# Altium PCB RX Layout.PcbDoc (part 1 of 2)
Units mm, origin at the board's own origin, x right, y up, seen from the top; angles counter-clockwise.
Board outline 88 x 80 mm, 4 copper layers (Top Layer, Mid 1, Mid 2, Bottom Layer), stack 0.603 mm thick; 110 components, 43 nets, 265 pads, 273 vias.
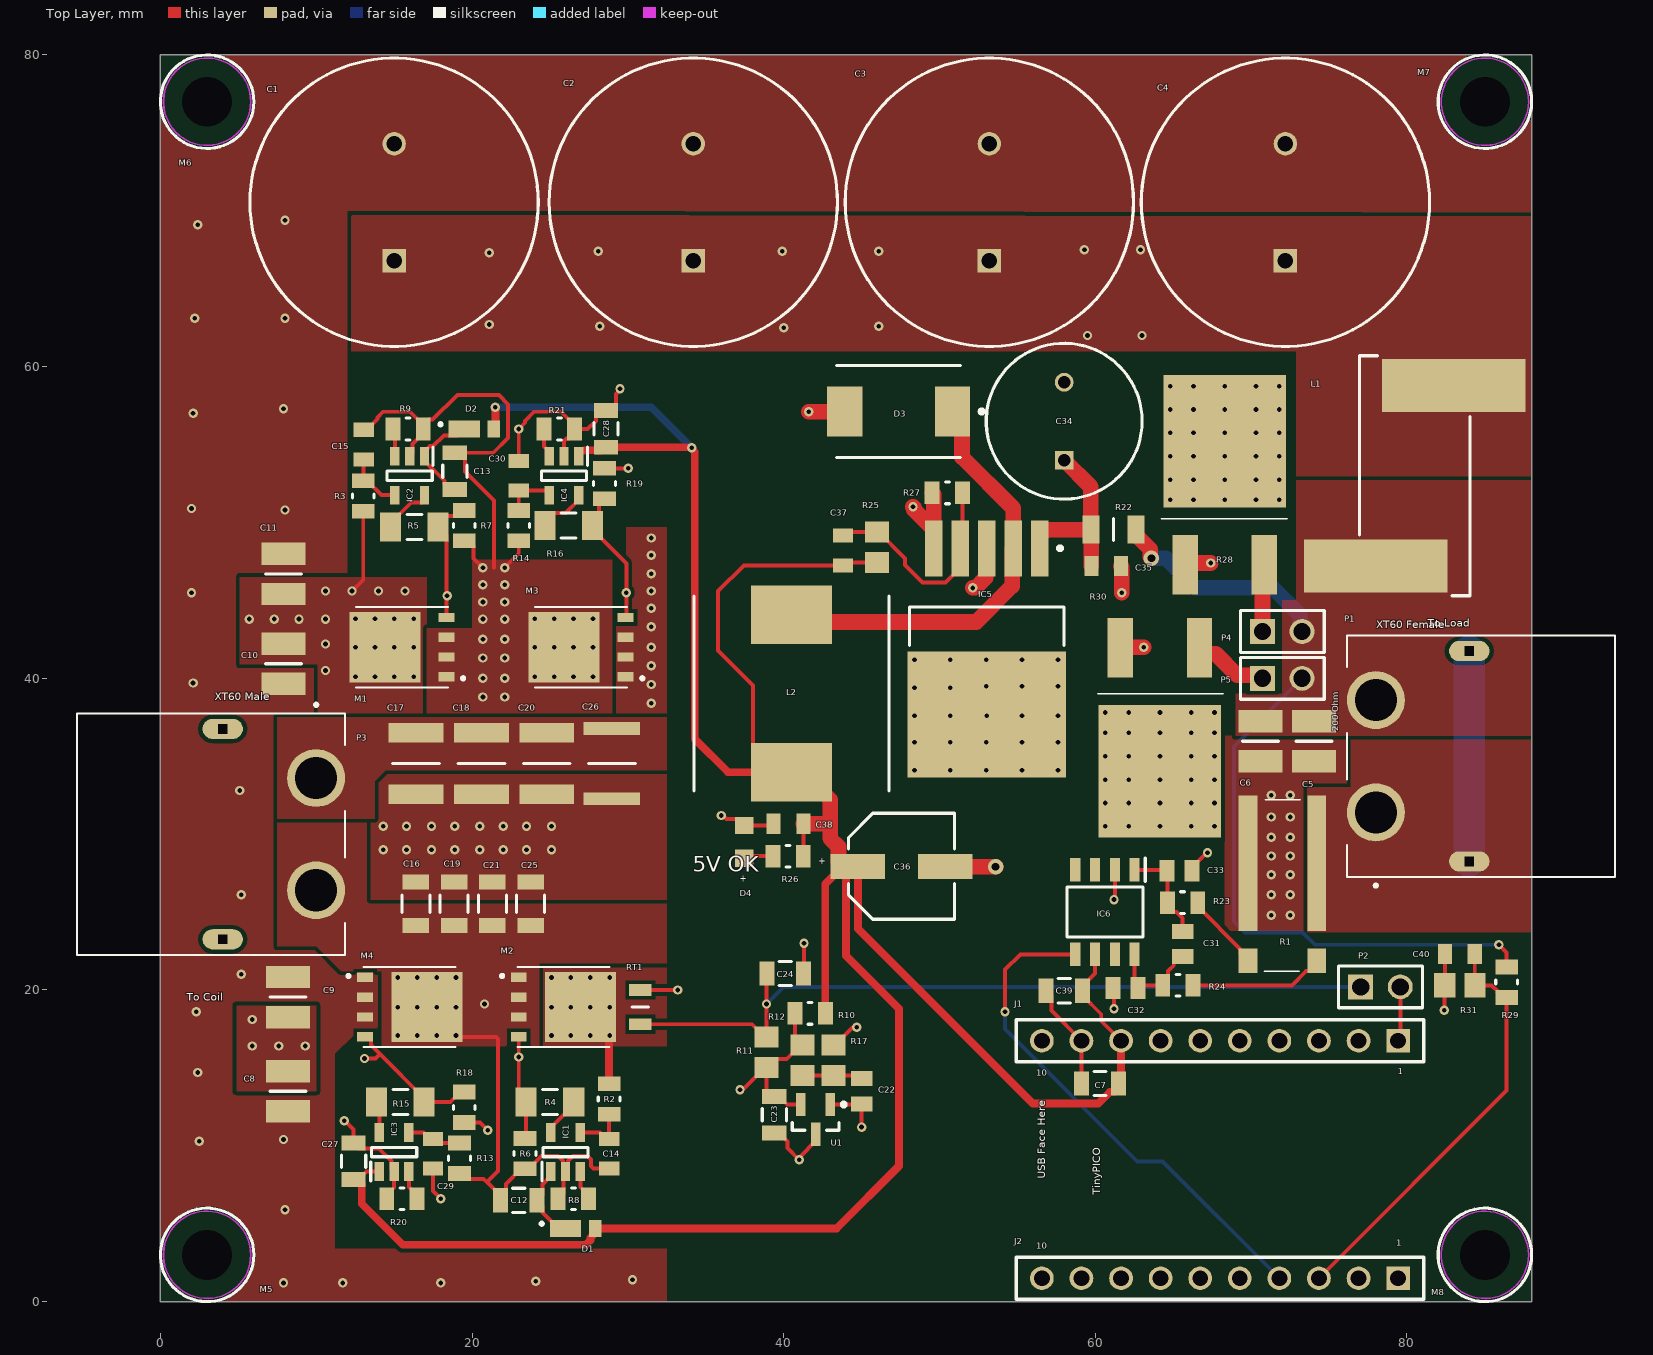
[diagram p0: Top Layer view]
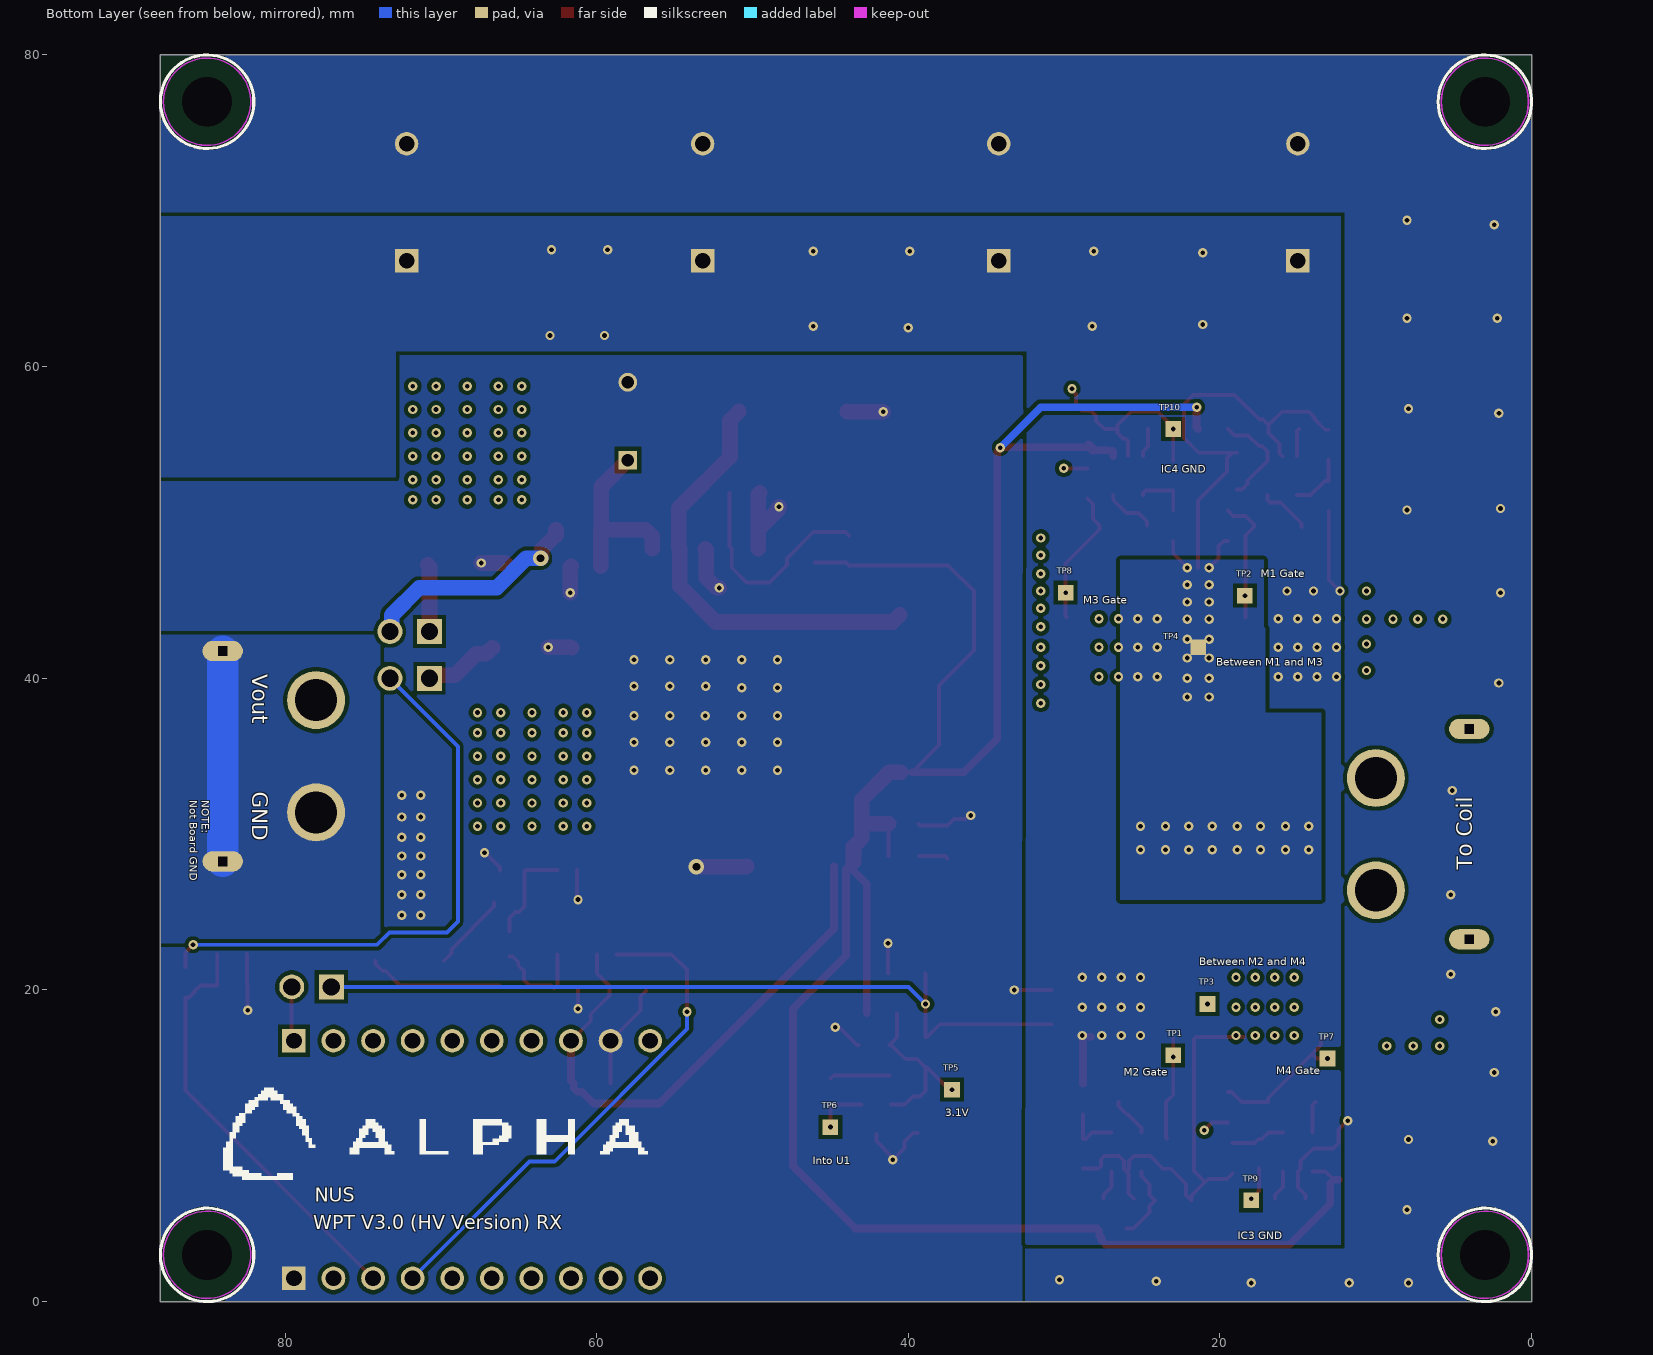
[diagram p1: Bottom Layer view, seen from below]
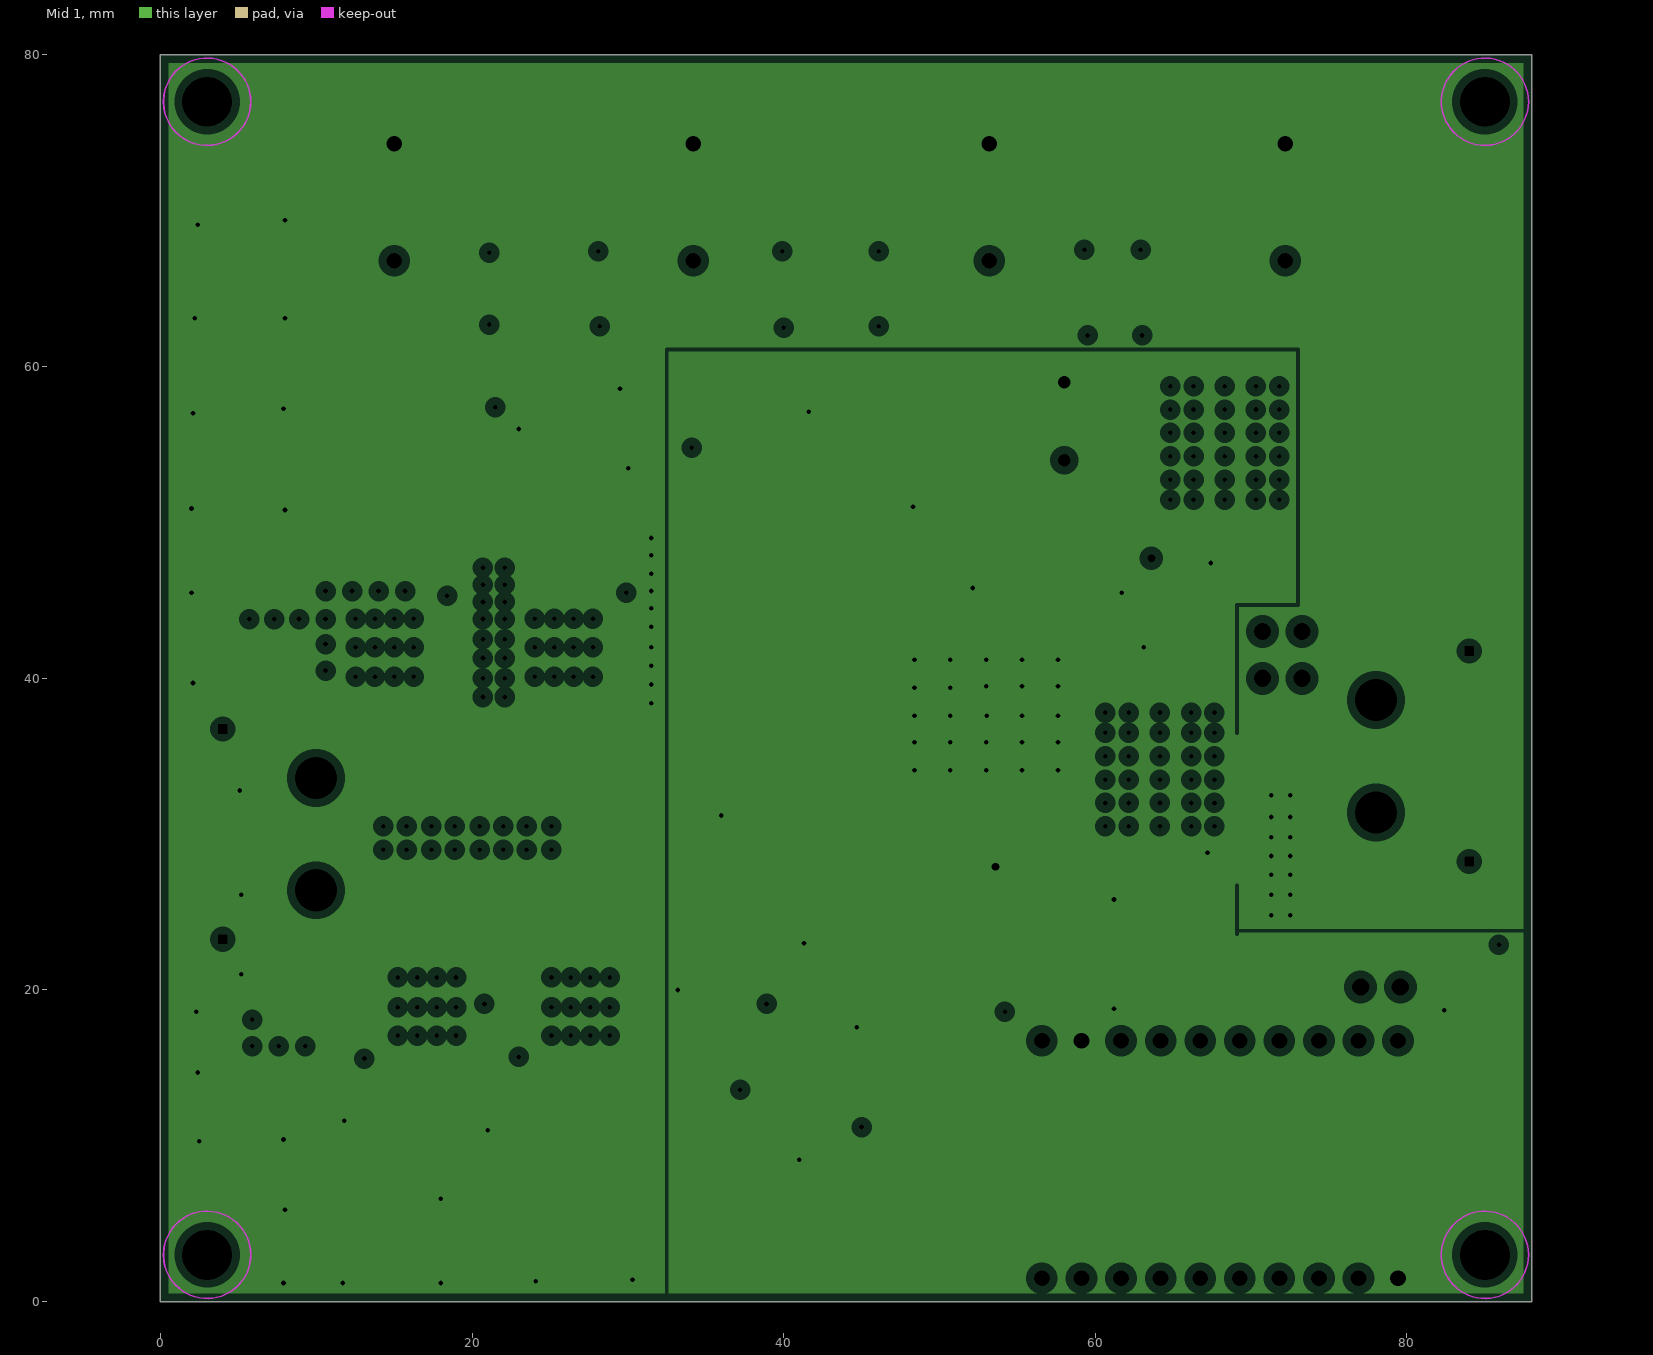
[diagram p2: Mid 1, clearances drawn from the general rule]
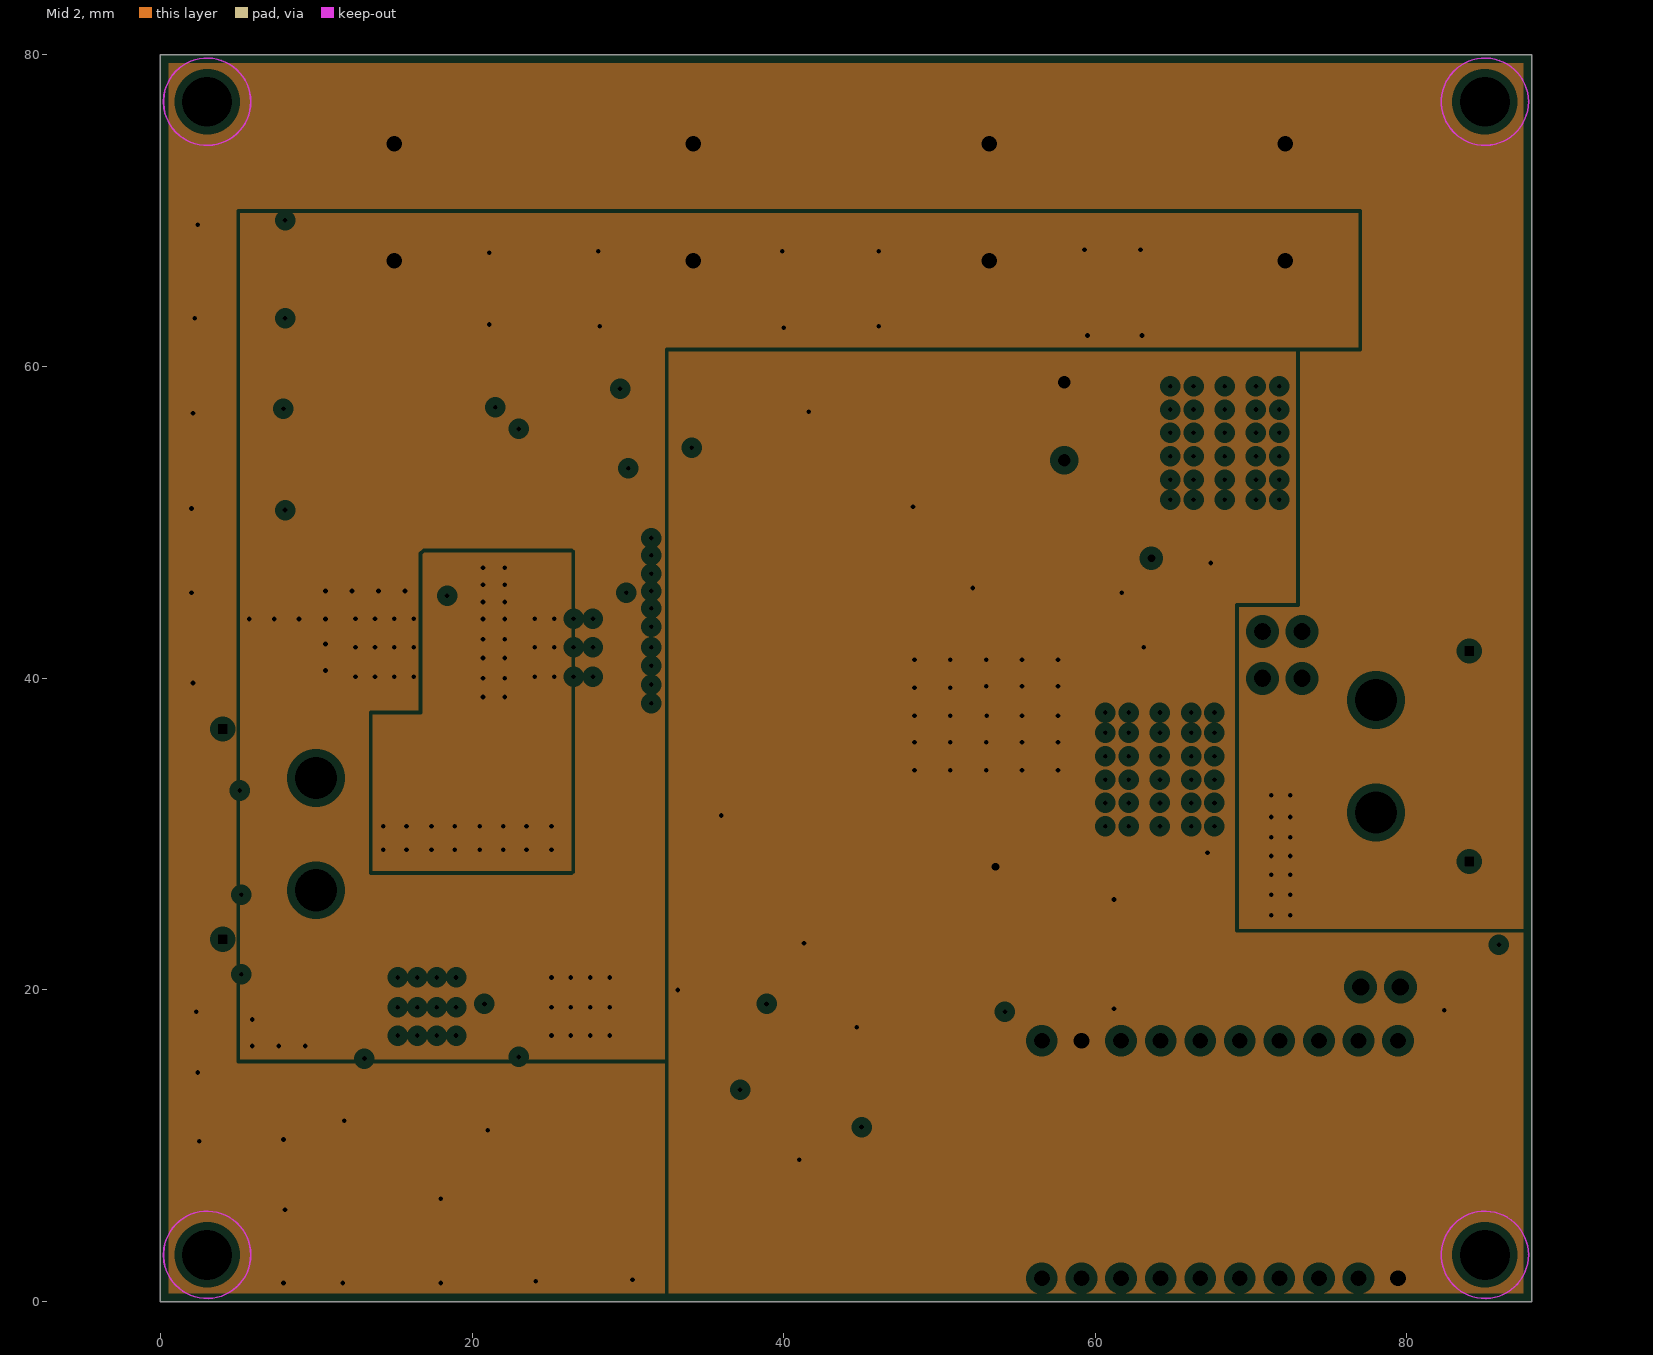
[diagram p3: Mid 2, clearances drawn from the general rule]
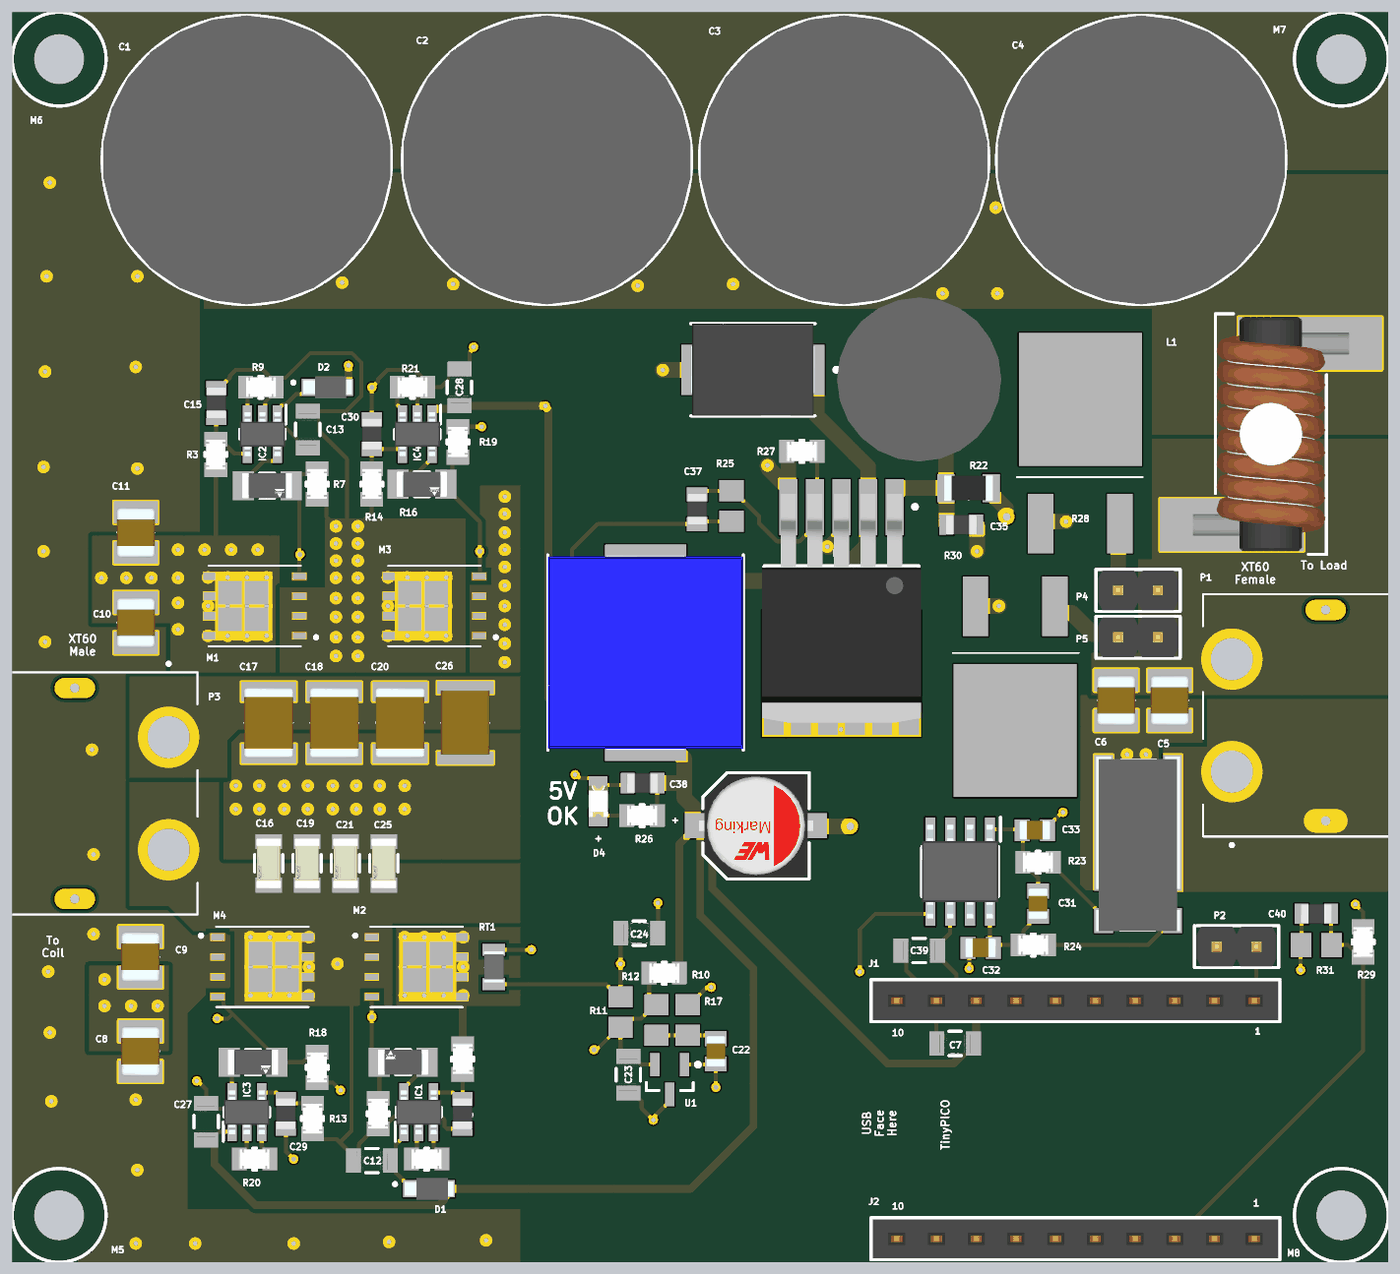
[diagram p4: 3D render of the assembled board from above, using the file's embedded part models]

## Layer stack, top to bottom
Top Solder: solder mask 0.0102, Solder Resist, Dk 3.5
Top Layer: signal copper 0.0356
Dielectric 2: prepreg 0.0711, PP-006, Dk 4.1
Mid 1: plane copper 0.035, net GND
Dielectric 1: dielectric 0.32, FR-4, Dk 4.8
Mid 2: plane copper 0.035, net (Multiple Nets)
Dielectric 3: prepreg 0.0711, PP-006, Dk 4.1
Bottom Layer: signal copper 0.0356
Bottom Solder: solder mask 0.0102, Solder Resist, Dk 3.5

## Board outline
0,80 88,80 88,0 0,0

## Design rules (kind name [scope] priority, off if disabled: settings)
Clearance [All] p1: gap=0.254 ignorepadtopadclearanceinfootprint=TRUE except(0: Arc-Hole Track-Hole SMDPad-Hole THPad-Hole Via-Hole Fill-Hole Poly-Hole Region-Hole Text-Hole)
Height [All] p1: minheight=0 maxheight=100 prefheight=12.7
HoleSize [All] p1: absolutevalues=TRUE maxlimit=10 minlimit=0.025 maxpercent=80.000 minpercent=20.000
MinimumSolderMaskSliver [All] p1: minsoldermaskwidth=0.1
PlaneClearance [All] p1: clearance=0.508
PlaneConnect [All] p1: planeconnectstyle=Direct reliefexpansion=0.508 reliefentries=4 reliefconductorwidth=0.254 reliefairgap=0.254
PolygonConnect [All] p1: connectstyle=Direct reliefconductorwidth=0.254 reliefentries=4 polygonreliefangle="90 Angle" airgapwidth=0.254
RoutingVias [All] p1: holewidth=0.711 width=1.27 viastyle="Through Hole" minholewidth=0.3 minwidth=0.6 maxholewidth=0.711 maxwidth=1.27
SilkToSilkClearance [All] p1: silktosilkclearance=0.1
SilkToSolderMaskClearance [IsPad] p1: minsilkscreentomaskgap=0.1 clearancetoexposedcopper=TRUE
SolderMaskExpansion [All] p1: expansion=0.102 istentingtop=FALSE
Width [All] p1: maxlimit=10 minlimit=0.254 preferedwidth=0.254
23 further rules are at their usual default settings.

## Components (designator, comment, footprint, x,y, rotation, side; value= is the part's Value field where it differs from the comment)
C1 "1000uF / 100VDC" CAPPRD750W80D1850H4200 15,66.8 r90 top
C2 "1000uF / 100VDC" CAPPRD750W80D1850H4200 34.2,66.8 r90 top
C3 "1000uF / 100VDC" CAPPRD750W80D1850H4200 53.2,66.8 r90 top
C4 "1000uF / 100VDC" CAPPRD750W80D1850H4200 72.2,66.8 r90 top
C5 "4.7uF / 100VDC" CAPC3225X280N 74.024,35.959 r90 top
C6 "4.7uF / 100VDC" CAPC3225X280N 70.6,35.959 r90 top
C7 "10nF/50V" "0805 CAPACITOR" 60.3,14 r0 top
C8 "4.7uF/100VDC" CAPC3225X280N 8.2,13.5 r90 top
C9 "4.7uF/100VDC" CAPC3225X280N 8.2,19.541 r270 top
C10 "4.7uF/100VDC" CAPC3225X280N 7.9,40.934 r90 top
C11 "4.7uF/100VDC" CAPC3225X280N 7.9,46.7 r270 top
C12 "100nF/50V" "0805 CAPACITOR" 23,6.5 r0 top
C13 "100nF/50V" "0805 CAPACITOR" 18.9,53.3 r270 top
C14 "100pF, 100V" WCAP-CSGP_0805_H=0.6mm_Reflow 28.8,9.5 r90 top
C15 "100pF, 100V" WCAP-CSGP_0805_H=0.6mm_Reflow 13.046,55 r270 top
C16 "470pF/200V" FP-C1206C-EB-MFG 16.4,25.532 r90 top value="470 pF"
C17 "100nF/250V" CAPC4532X220N 16.4,34.532 r270 top
C18 "100nF/250V" CAPC4532X220N 20.6,34.532 r270 top
C19 "470pF/200V" FP-C1206C-EB-MFG 18.854,25.532 r90 top value="470 pF"
C20 "100nF/250V" CAPC4532X220N 24.8,34.532 r270 top
C21 "470pF/200V" FP-C1206C-EB-MFG 21.309,25.532 r90 top value="470 pF"
C22 "1nF/50V" CAPC2012X90N 45,13.5 r90 top
C23 "10nF/50V" "0805 CAPACITOR" 39.4,12 r90 top
C24 "100nF/50V" "0805 CAPACITOR" 40.1,21.057 r180 top
C25 "470pF/200V" FP-C1206C-EB-MFG 23.763,25.532 r90 top value="470 pF"
C26 "47nF/250V" CAPC4532X350N 28.974,34.532 r270 top
C27 "100nF/50V" "0805 CAPACITOR" 12.4,9 r270 top
C28 "100nF/50V" "0805 CAPACITOR" 28.6,56 r270 top
C29 "100pF, 100V" WCAP-CSGP_0805_H=0.6mm_Reflow 17.5,9.5 r90 top
C30 "100pF, 100V" WCAP-CSGP_0805_H=0.6mm_Reflow 23,53 r270 top
C31 "1nF/50V" CAPC2012X90N 65.6,22.944 r270 top
C32 "1nF/50V" CAPC2012X90N 61.931,20.121 r180 top
C33 "1nF/50V" CAPC2012X90N 65.4,27.654 r180 top
C34 "100uF / 100VDC" CAPPRD500W60D1000H2200 58,54 r90 top
C35 "100nF, 100V" WCAP-CSGP_0805_H=1.25MM 60.7,47.2 r180 top
C36 "100uF, 16V" WCAP-ASLI_D6.3H5.5 47.566,27.936 r180 top
C37 "33nF, 25V" WCAP-CSGP_0805_H=0.8mm_Reflow 43.8,48.2 r270 top
C38 "1uF, 25V" WCAP-CSGP_0805_H=1.25MM 40.309,30.661 r0 top
C39 "100nF/50V" "0805 CAPACITOR" 58,19.947 r180 top
C40 "10nF, 100V" WCAP-CSGP_0805_H=0.8mm_Reflow 83.399,22.3 r0 top
D1 "Schottky Diode" RB400VAM50TR 26,4.7 r270 top
D2 "Schottky Diode" RB400VAM50TR 19.5,56 r270 top
D3 "Schottky Diode" DIONM8059X265N 47.371,57.121 r180 top
D4 "Green, 3.2V" WL-SMCW_0805 37.48,29.5 r270 top
IC1 "Gate Driver IC" SOT95P280X145-5N 26,9.6 r90 top
IC2 "Gate Driver IC" SOT95P280X145-5N 16,53 r270 top
IC3 "Gate Driver IC" SOT95P280X145-5N 15,9.6 r90 top
IC4 "Gate Driver IC" SOT95P280X145-5N 25.9,53 r270 top
IC5 "DCDC Adj" TO-263-5 53.032,41.871 r270 top
IC6 "Amplifier" SOIC127P600X175-8N 60.621,25 r270 top
J1 "61301011821" 61301011821 68,16.74 r180 top
J2 "61301011821" 61301011821 68,1.5 r180 top
L1 "1uH, 22.5A" 7847227010 80.5,53 r270 top
L2 "100uH/2.1A/150mOhm" INDPM125125X800N 40.503,39.016 r270 top
M1 "ISC0805NLS" PG-TDSON-8 15.5,42 r180 top
M2 "ISC0805NLS" PG-TDSON-8 25.863,18.9 r0 top
M3 "ISC0805NLS" PG-TDSON-8 27,42 r180 top
M4 "ISC0805NLS" PG-TDSON-8 16,18.9 r0 top
M5 "M3 Mounting Hole" "M3 HOLE" 3,3 r0 top
M6 "M3 Mounting Hole" "M3 HOLE" 3,77 r0 top
M7 "M3 Mounting Hole" "M3 HOLE" 85,77 r0 top
M8 "M3 Mounting Hole" "M3 HOLE" 85,3 r0 top
P1 "XT60-F" AMASS_XT60PW-F 78,35 r90 top
P2 "61300211121" 61300211121 78.3,20.2 r0 top
P3 "XT60-F" AMASS_XT60PW-F 10,30 r270 top
P4 "61300211121" 61300211121 72,43 r0 top
P5 "61300211121" 61300211121 72,40 r0 top
R1 "0R005 5W" FC4L110R005FER 72,25 r180 top
R2 "1KR" FP-CRCW0805-E3-MFG 28.8,13 r90 top
R3 "1KR" FP-CRCW0805-E3-MFG 13.021,51.7 r270 top
R4 "10R" FP-CRCW1206-E3-IPC_A 25,12.8 r180 top
R5 "10R" FP-CRCW1206-E3-IPC_A 16.3,49.7 r0 top
R6 "10KR" FP-CRCW0805-E3-MFG 23.4,9.5 r90 top
R7 "10KR" FP-CRCW0805-E3-MFG 19.5,49.8 r90 top
R8 "10KR" FP-CRCW0805-E3-MFG 26.5,6.6 r0 top
R9 "10KR" FP-CRCW0805-E3-MFG 15.9,56 r180 top
R10 "1KR" FP-CRCW0805-E3-MFG 41.7,18.5 r0 top
R11 "10k" "0805 RESISTOR" 38.9,16 r270 top
R12 "15K" "0805 RESISTOR" 41.2,15.5 r90 top
R13 "1KR" FP-CRCW0805-E3-MFG 19.2,9.2 r270 top
R14 "1KR" FP-CRCW0805-E3-MFG 23,49.8 r270 top
R15 "10R" FP-CRCW1206-E3-IPC_A 15.4,12.8 r0 top
R16 "10R" FP-CRCW1206-E3-IPC_A 26.2,49.8 r0 top
R17 "10K" "0805 RESISTOR" 43.2,15.5 r270 top
R18 "10KR" FP-CRCW0805-E3-MFG 19.5,12.47 r90 top
R19 "10KR" FP-CRCW0805-E3-MFG 28.5,52.5 r270 top
R20 "10KR" FP-CRCW0805-E3-MFG 15.5,6.6 r0 top
R21 "10KR" FP-CRCW0805-E3-MFG 25.6,56 r180 top
R22 "3R" 1206_RESISTOR 61.161,49.546 r0 top
R23 "470R" FP-CRCW0805-E3-MFG 65.6,25.6 r0 top
R24 "470R" FP-CRCW0805-E3-MFG 65.3,20.3 r0 top
R25 "15K" "0805 RESISTOR" 46,48.4 r270 top
R26 "2KO" FP-CRCW0805-E3-MFG 40.284,28.582 r0 top
R27 "5K Ohm" FP-CRCW0805-E3-MFG 50.5,51.9 r0 top
R28 "200 Ohm / 25W" PWR163S253000FE 68.306,51.249 r0 top
R29 "1M ohm" FP-CRCW0805-E3-MFG 86.399,20.5 r90 top
R30 "200 Ohm / 25W" PWR163S253000FE 64.146,38 r180 top
R31 "56K" "0805 RESISTOR" 83.399,20.3 r0 top
RT1 "Thermistor 10K" THRMC2012X95N 30.8,18.9 r90 top
TP1 "TP" "TEST POINT" 23,15.8 r180 bottom
TP2 "TP" "TEST POINT" 18.4,45.3 r180 bottom
TP3 "TP" "TEST POINT" 20.8,19.1 r180 bottom
TP4 "TP" "TEST POINT" 21.4,42 r180 bottom
TP5 "TP" "TEST POINT" 37.2,13.6 r180 bottom
TP6 "TP" "TEST POINT" 45,11.2 r180 bottom
TP7 "TP" "TEST POINT" 13.1,15.6 r180 bottom
TP8 "TP" "TEST POINT" 29.9,45.5 r180 bottom
TP9 "TP" "TEST POINT" 18,6.5 r180 bottom
TP10 "TP" "TEST POINT" 23,56 r90 bottom
U1 "Shunt Voltage Reference Diode" SOT23-3_N 42.05,11.696 r270 top

## Footprints (in the part's own frame and the unit in brackets; to place one, negate y for a bottom-side part, rotate by r counter-clockwise, add the part's x,y. Pads: shape width x height; smd on the part's side, far side on the other; paste and mask are expansions set on the pad)
"0805 CAPACITOR" [mm]
  rect 0.956x1.556 smd paste+0 mask+0: 1(-1.175,0) 2(1.175,0)
  silkscreen extent -0.4,-0.78 0.4,0.78, body extent -2.15,-1.28 2.15,1.28, height 0.25
"0805 RESISTOR" [mm] "Chip Resistor, 2-Leads, Body 2.00x1.25mm, IPC Low Density"
  rect 1.35x1.55 smd: 1(-0.975,0) 2(0.975,0)
  body extent -1.1,-0.72 1.1,0.72, height 0.7
1206_RESISTOR [mm]
  rect 1.1x1.8 smd: 1(-1.45,0) 2(1.45,0)
  silkscreen extent 0,-0.7 0,0.7, body extent -1.55,-0.8 1.55,0.8, height 0.65
7847227010 [mm] "Rod Core Inductor SMT, body 15x7.1mm"
  rect 3.4x9.2 smd: 1(-5.8,2.5) 2(5.8,-2.5)
  silkscreen extent -7.7,-3.55 7.7,3.55, body extent -7.5,-5 7.5,5, height 7.85
61300211121 [mm] "Pin Header, pitch 2.54 mm, THT, Vertical, single row, 2p"
  rect 1.6x1.6 hole 1.1: 1(-1.27,0)
  round 1.6 hole 1.1: 2(1.27,0)
  silkscreen extent -2.69,-1.35 2.69,1.35, body extent -2.54,-1.27 2.54,1.27, height 8.57
61301011821 [mm] "Socket Header, Pitch 2.54 mm, THT, Vertical, single row, 10p"
  rect 1.52x1.52 hole 1.02: 1(-11.43,0)
  round 1.52 hole 1.02: 2(-8.89,0) 3(-6.35,0) 4(-3.81,0) 5(-1.27,0) 6(1.27,0) 7(3.81,0) 8(6.35,0) 9(8.89,0) 10(11.43,0)
  silkscreen extent -13.08,-1.35 13.08,1.35, body extent -12.95,-1.25 12.95,1.25, height 8.55
AMASS_XT60PW-F [mm]
  round 3.716 hole 2.7: 1(-3.6,0) 2(3.6,0)
  oval 1.3x2.6 hole 0.6 square: S1(-6.75,-6) S2(6.75,-6)
  silkscreen extent -8.4,-15.35 7.75,1.85
CAPC2012X90N [mm]
  rect 0.96x1.39 smd: 1(-0.81,0) 2(0.81,0)
  body extent -1,-0.63 1,0.63, height 0.9
CAPC3225X280N [mm]
  rect 1.43x2.82 smd: 1(-1.29,0) 2(1.29,0)
  silkscreen extent 0,-1.15 0,1.15, body extent -1.6,-1.25 1.6,1.25, height 2.8
CAPC4532X220N [mm]
  rect 1.25x3.52 smd: 1(-1.98,0) 2(1.98,0)
  silkscreen extent 0,-1.5 0,1.5, body extent -2.25,-1.6 2.25,1.6, height 2.2
CAPC4532X350N [mm]
  rect 0.81x3.61 smd: 1(-2.25,0) 2(2.25,0)
  silkscreen extent 0,-1.5 0,1.5, body extent -2.05,-1.57 2.05,1.57, height 3.46
CAPPRD500W60D1000H2200 [mm]
  rect 1.2x1.2 hole 0.8: 1(0,0)
  round 1.2 hole 0.8: 2(5,0)
  silkscreen extent -2.5,-5 7.5,5, body extent -2.75,-5.25 7.75,5.25, height 22
CAPPRD750W80D1850H4200 [mm]
  rect 1.5x1.5 hole 1: 1(0,0)
  round 1.5 hole 1: 2(7.5,0)
  silkscreen extent -5.5,-9.25 13,9.25, body extent -5.5,-9.25 13,9.25, height 42
DIONM8059X265N [mm]
  rect 2.25x3.2 smd: 1(-3.45,0) 2(3.45,0)
  silkscreen extent -5.46,-2.95 3.98,2.95, body extent -3.98,-2.95 3.98,2.95, height 2.65
FC4L110R005FER [mm]
  rect 1.2x8.7 smd: 1(-2.2,-3.125) 2(2.2,-3.125)
  rect 1.2x1.6 smd: 3(2.2,3.125) 4(-2.2,3.125)
  silkscreen extent -1.15,-7.2 1.15,3.8, body extent -2.68,-7.35 2.68,3.8, height 0.8
FP-C1206C-EB-MFG [mm]
  rect 0.95x1.7 smd paste+0 mask+0: 1(-1.4,0) 2(1.4,0)
  silkscreen extent -0.55,-0.9 0.55,0.9, body extent -2,-1 2,1, height 0.25
FP-CRCW0805-E3-MFG [mm]
  rect 0.95x1.45 smd paste+0 mask+0: 1(-0.975,0) 2(0.975,0)
  silkscreen extent -0.13,-0.7 0.13,0.7, body extent -1.55,-0.82 1.55,0.82, height 0.25
FP-CRCW1206-E3-IPC_A [mm]
  rect 1.356x1.858 smd paste+0 mask+0: 1(-1.526,0) 2(1.526,0)
  silkscreen extent -0.47,-0.8 0.47,0.8, body extent -2.7,-1.43 2.7,1.43, height 0.25
INDPM125125X800N [mm]
  rect 3.75x5.2 smd: 1(-5.05,0) 2(5.05,0)
  silkscreen extent -6.25,-6.25 6.25,6.25, body extent -6.25,-6.25 6.25,6.25, height 8
"M3 HOLE" [mm]
  round 0 hole 3.2 unplated mask+0.1: 1(0,0)
  Keep-Out Layer circle w0.1: c0,0 r2.8
  silkscreen extent -3,-3 3,3
PG-TDSON-8 [mm]
  rect 1.025x0.6 smd paste-2 mask+0: 1(-2.863,1.905) 2(-2.863,0.635) 3(-2.863,-0.635) 4(-2.863,-1.905)
  rect 4.555x4.51 smd paste-3 mask+0: 5_8(1.098,0)
  silkscreen extent -4.03,-2.58 2.95,2.58
PWR163S253000FE [mm]
  rect 1.62x3.81 smd: 1(-2.54,-3.97) 2(2.54,-3.97)
  rect 7.87x8.51 smd: 3(0,3.97)
  silkscreen extent -4.07,-1 4,-1
RB400VAM50TR [mm]
  rect 1.1x2 smd: 1(0,0)
  rect 1.1x0.8 smd: 2(0,1.9)
  silkscreen extent -0.4,-1.62 -0.2,-1.43, body extent -0.7,-0.89 0.7,2.22, height 0.9
SOIC127P600X175-8N [mm]
  rect 1.525x0.65 smd: 1(-2.712,1.905) 2(-2.712,0.635) 3(-2.712,-0.635) 4(-2.712,-1.905) 5(2.712,-1.905) 6(2.712,-0.635) 7(2.712,0.635) 8(2.712,1.905)
  silkscreen extent -3.47,-2.45 1.6,2.58, body extent -3,-2.45 3,2.45, height 1.75
SOT23-3_N [mm] "SOT23, 3-Leads, Body 2.9x1.3mm, Pitch 0.95mm, Lead Span 2.4mm, IPC Medium Density"
  rect 1.5x0.6 smd: 1(-0.95,0.95) 2(-0.95,-0.95) 3(0.95,0)
  silkscreen extent -1.07,-1.5 0.7,1.93, body extent -0.7,-1.52 0.7,1.52, height 1.12
SOT95P280X145-5N [mm]
  rect 1.2x0.6 smd: 1(-1.25,0.95) 2(-1.25,0) 3(-1.25,-0.95) 4(1.25,-0.95) 5(1.25,0.95)
  silkscreen extent -1.85,-1.45 0.3,1.5, body extent -1.4,-1.45 1.4,1.45, height 1.45
"TEST POINT" [mm]
  rect 1x1 smd: 1(0,0)
THRMC2012X95N [mm]
  rect 0.75x1.45 smd: 1(-1.1,0) 2(1.1,0)
  silkscreen extent 0,-0.53 0,0.53, body extent -1,-0.63 1,0.63, height 0.95
TO-263-5 [mm] "D2-PAK, 6-Pads, Body 8,9x9,9mm (max), IPC Low Density"
  rect 3.6x1.15 smd: 1(-6.45,3.4) 2(-6.45,1.7) 3(-6.45,0) 4(-6.45,-1.7) 5(-6.45,-3.4)
  rect 8.1x10.15 smd paste-5: 6(4.2,0)
  silkscreen extent -6.6,-4.95 -0.25,4.95, body extent -7.31,-5.08 7.33,5.08, height 4.57
WCAP-ASLI_D6.3H5.5 [mm] "Aluminium Electrolytic V-Chip SMT Capacitors, 6.3x5.5mm"
  rect 3.5x1.6 smd: 1(2.8,0) 2(-2.8,0)
  silkscreen extent -3.4,-3.4 3.4,3.4, body extent -3.65,-3.3 3.65,3.3, height 5.5
WCAP-CSGP_0805_H=0.6mm_Reflow [mm] "Ceramic Capacitors, body 2x1.25mm"
  rect 0.9x1.3 smd: 1(-0.95,0) 2(0.95,0)
  body extent -1,-0.62 1,0.63, height 0.6
WCAP-CSGP_0805_H=0.8mm_Reflow [mm] "Ceramic Capacitors, body 2x1.25mm"
  rect 0.9x1.3 smd: 1(-0.95,0) 2(0.95,0)
  body extent -1,-0.62 1,0.63, height 0.8
WCAP-CSGP_0805_H=1.25MM [mm] "Ceramic Capacitors, body 2x1.25mm"
  rect 0.9x1.3 smd: 1(-0.95,0) 2(0.95,0)
  body extent -1,-0.62 1,0.63, height 1.25
WL-SMCW_0805 [mm] "SMD Mono-color Chip LED, body 2.0x1.25mm"
  rect 1.1x1.2 smd: 1(-1.05,0) 2(1.05,0)
  body extent -1,-0.63 1,0.62, height 0.7

## Part data
C1 C2 C3 C4: library part UPW2A102MHD, "Capacitor Polarised", Manufacturer_Name=Nichicon, Mouser Part Number=647-UPW2A102MHD, Arrow Part Number=UPW2A102MHD, Arrow Price/Stock=https://www.arrow.com/en/products/upw2a102mhd/nichicon, Datasheet Link=http://www.nichicon.co.jp/english/products/pdfs/e-pw.pdf, Height=42mm, Manufacturer_Part_Number=UPW2A102MHD, Mouser Price/Stock=https://www.mouser.co.uk/ProductDetail/Nichicon/UPW2A102MHD/?qs=vtm6YctIBsEhKvWuRIWL3Q%3D%3D
C5 C6: library part CL32B475KCVZNWE, "Capacitor", Manufacturer_Name="Samsung Electro-Mechanics", Height=2.8mm, Manufacturer_Part_Number=CL32B475KCVZNWE
C7 C23: library part 885012207092, Supplier Part Number 1=710-885012207092, Supplier 1=Mouser
C8 C9 C10 C11: library part CNC6P1X7R2A475K250AE, Manufacturer_Name=TDK, Mouser2 Part Number=810-CNC6P1X7R2A475K2, Datasheet Link=https://componentsearchengine.com//CNC6P1X7R2A475K250AE.pdf, Height=2.8mm, Manufacturer_Part_Number=CNC6P1X7R2A475K250AE, Mouser2 Price/Stock=https://www.mouser.com/Search/Refine.aspx?Keyword=810-CNC6P1X7R2A475K2, Supplier 1=Mouser, Supplier Part Number 1=810-CNC6P1X7R2A475K2
C12 C13 C24 C27 C28 C39: library part 885012207098, Supplier Part Number 1=710-885012207098, Supplier 1=Mouser
C14 C15 C29 C30: library part 885012007082, "WCAP-CSGP Multilayer Ceramic Chip Capacitor, General Purpose, size 0805, NP0, 100pF, 100V", Capacitance=100pF, Capacitance Tolerance=+/-5%, Isolation Resistance  min.=10GOhm, Manufacturer="Wurth Elektronik", Operating Temperature="-55 to +125degC", Rated Voltage=100VDC, Ceramic Type=NP0, ComponentLink1Description=Manufacturer, ComponentLink1URL=http://www.we-online.de, ComponentLink2Description=Datasheet, ComponentLink2URL=https://www.we-online.com/catalog/datasheet/885012007082.pdf, Dissipation Factor max.=-, Height=0.6mm, Manufacturer Part Number=885012007082, Mounting Technology=SMT, Packaging="Tape and Reel", Published Date="April 2021", Q-Factor min.=1000, Size=0805, Technical Reference=NP00805101J100DFCT10000
C16 C19 C21 C25: library part C1206C471K2GACTU, "CAP CER 470PF 200V 10% NP0 1206", Capacitance="470 pF", Manufacturer=KEMET, Package=C1206C-EB, Temperature="-55°C to +150°C", Temperature Characteristic=C0G, Temperature Coefficient=15%, Temperature Range High=+150°C, Temperature Range Low=-55°C, Tolerance=0.1, Voltage Rating="200 V", Automotive=Yes, Automotive Grade="Grade 0", Category=Cap, ComponentLink2Description=Datasheet, ComponentLink2URL=https://content.kemet.com/datasheets/KEM_C1007_X8R_ULTRA_150C_SMD.pdf, Device Class L1="Passive Components", Device Class L2=Capacitors, Device Class L3="Ceramic Capacitors", Digikey Description="CAP CER 470PF 200V 10% NP0 1206", Height=0.88mm, Ipc Land Pattern Name=CAPC320160X78, Lead Free=Yes, Manufacturer Part Number=C1206C471K2GACTU, Material=Ceramic, Mouser Description="Multilayer Ceramic Capacitors MLCC - SMD/SMT 200volts 470pF C0G 10%", Octopart=https://octopart.com/c1206c471k2gactu-kemet-3658280, RoHS=TRUE
C17 C18 C20: library part C1812C104JAGACAUTO, Manufacturer_Name=Kemet, Supplier Part Number 1=80-C1812C104JAGAUTO, Datasheet Link=https://api.kemet.com/component-edge/download/datasheet/C1812C104JAGACAUTO.pdf, Height=2.2mm, Manufacturer_Part_Number=C1812C104JAGACAUTO, Supplier 1=Mouser
C22 C31 C32 C33: library part 885012207086, Manufacturer_Name="Wurth Elektronik", Supplier Part Number 1=710-885012207086, Datasheet Link=https://katalog.we-online.com/pbs/datasheet/885012207086.pdf, Height=0.9mm, Manufacturer_Part_Number=885012207086, Supplier 1=Mouser
C26: library part C4532C0G2E473J320KA, "Capacitor / 47nF/250V  / C0G", Manufacturer_Name=TDK, Supplier Part Number 1=810-C4532C0G2E473J, Datasheet Link=https://product.tdk.com/info/en/catalog/datasheets/mlcc_commercial_midvoltage_en.pdf, Height=3.5mm, Manufacturer_Part_Number=C4532C0G2E473J320KA, Supplier 1=Mouser
C34: library part ESH107M100AH4AA, "Capacitor Polarised", Manufacturer_Name=Kemet, Mouser Part Number=80-ESH107M100AH4AA, Datasheet Link=https://componentsearchengine.com/Datasheets/1/ESH107M100AH4AA.pdf, Height=22mm, Manufacturer_Part_Number=ESH107M100AH4AA, Mouser Price/Stock=https://www.mouser.co.uk/ProductDetail/KEMET/ESH107M100AH4AA?qs=gt1LBUVyoHkVRbiIYuZpEw%3D%3D
C35: library part 885012207128, "WCAP-CSGP Multilayer Ceramic Chip Capacitor, General Purpose, size 0805, X7R, 100nF, 100V", Capacitance=100nF, Capacitance Tolerance=+/-10%, Isolation Resistance=>=1GOhm, Manufacturer="Wurth Elektronik", Operating Temperature="-55 to +125degC", Rated Voltage=100VDC, Ceramic Type=X7R, ComponentLink1Description=Manufacturer, ComponentLink1URL=http://www.we-online.de, ComponentLink2Description=Datasheet, ComponentLink2URL=https://www.we-online.com/catalog/datasheet/885012207128.pdf, Dissipation Factor=#NAME?, Height=1.25mm, Manufacturer Part Number=885012207128, Mounting Technology=SMT, Packaging="Tape and Reel", Published Date="May 2020", Size=0805, Technical Reference=X7R0805104K100DFCT10000
C36: library part 865080343009, "WCAP-ASLI Aluminum Electrolytic Capacitor, V-Chip, SMT, D6.3xH5.5mm, 100uF, 16V", Capacitance=100uF, Capacitance Tolerance=+/-20%, Leakage Current=16uA, Manufacturer="Wurth Elektronik", Operating Temperature="-55 to +105degC", Rated Voltage=16VDC, Ripple Current=255mA, ComponentLink1Description=Manufacturer, ComponentLink1URL=http://www.we-online.de, ComponentLink2Description=Datasheet, ComponentLink2URL=https://www.we-online.com/catalog/datasheet/865080343009.pdf, Diameter=6.3mm, Dissipation Factor=16%, Endurance=2000h, Height=5.5mm, Manufacturer Part Number=865080343009, Mounting Technology=SMT, Packaging="Tape and Reel", Published Date="October 2020", Technical Reference=ASED055101M016DVCTBB000
C37: library part 885012207069, "WCAP-CSGP Multilayer Ceramic Chip Capacitor, General Purpose, size 0805, X7R, 33nF, 25V", Capacitance=33nF, Capacitance Tolerance=+/-10%, Isolation Resistance  min.=10GOhm, Manufacturer="Wurth Elektronik", Operating Temperature="-55 to +125degC", Rated Voltage=25VDC, Ceramic Type=X7R, ComponentLink1Description=Manufacturer, ComponentLink1URL=http://www.we-online.de, ComponentLink2Description=Datasheet, ComponentLink2URL=https://www.we-online.com/catalog/datasheet/885012207069.pdf, Dissipation Factor max.=3.5%, Height=0.8mm, Manufacturer Part Number=885012207069, Mounting Technology=SMT, Packaging="Tape and Reel", Published Date="April 2021", Q-Factor min.=-, Size=0805, Technical Reference=X7R0805333K025DFCT10000
C38: library part 885012207078, "WCAP-CSGP Multilayer Ceramic Chip Capacitor, General Purpose, size 0805, X7R, 1uF, 25V", Capacitance=1uF, Capacitance Tolerance=+/-10%, Isolation Resistance  min.=0.5GOhm, Manufacturer="Wurth Elektronik", Operating Temperature="-55 to +125degC", Rated Voltage=25VDC, Ceramic Type=X7R, ComponentLink1Description=Manufacturer, ComponentLink1URL=http://www.we-online.de, ComponentLink2Description=Datasheet, ComponentLink2URL=https://www.we-online.com/catalog/datasheet/885012207078.pdf, Dissipation Factor max.=5%, Height=1.25mm, Manufacturer Part Number=885012207078, Mounting Technology=SMT, Packaging="Tape and Reel", Published Date="April 2021", Q-Factor min.=-, Size=0805, Technical Reference=X7R0805105K025DFCT10000
C40: library part 885012207122, "WCAP-CSGP Multilayer Ceramic Chip Capacitor, General Purpose, size 0805, X7R, 10nF, 100V", Capacitance=10nF, Capacitance Tolerance=+/-10%, Isolation Resistance  min.=10GOhm, Manufacturer="Wurth Elektronik", Operating Temperature="-55 to +125degC", Rated Voltage=100VDC, Ceramic Type=X7R, ComponentLink1Description=Manufacturer, ComponentLink1URL=http://www.we-online.de, ComponentLink2Description=Datasheet, ComponentLink2URL=https://www.we-online.com/catalog/datasheet/885012207122.pdf, Dissipation Factor max.=2.5%, Height=0.8mm, Manufacturer Part Number=885012207122, Mounting Technology=SMT, Packaging="Tape and Reel", Published Date="April 2021", Q-Factor min.=-, Size=0805, Technical Reference=X7R0805103K100DFCT10000
D1 D2: library part RB400VAM-50TR, Manufacturer_Name="ROHM Semiconductor", Mouser2 Part Number=755-RB400VAM-50TR, Datasheet Link=https://componentsearchengine.com//RB400VAM-50TR.pdf, Height=0.8mm, Manufacturer_Part_Number=RB400VAM-50TR, Mouser2 Price/Stock=https://www.mouser.com/Search/Refine.aspx?Keyword=755-RB400VAM-50TR, Supplier 1=Mouser, Supplier Part Number 1=755-RB400VAM-50TR
D3: library part S310, Manufacturer_Name="ON Semiconductor", Mouser Part Number=512-S310, Arrow Part Number=S310, Arrow Price/Stock=https://www.arrow.com/en/products/s310/on-semiconductor?region=nac, Datasheet Link=https://componentsearchengine.com/Datasheets/2/S310.pdf, Height=2.65mm, Manufacturer_Part_Number=S310, Mouser Price/Stock=https://www.mouser.co.uk/ProductDetail/ON-Semiconductor-Fairchild/S310?qs=AZz8fAaf6P%2FJSlbiibJLxA%3D%3D
D4: library part 150080GS75000, "WL-SMCW SMT Mono-color Chip LED Waterclear, size 0805, Green, 3.2V, 140deg", Emitting Color=Green, Forward Voltage typ.=3.2V, Operating Temperature="-40 to +85degC", Chip Technology=InGaN, ComponentLink1Description=Manufacturer, ComponentLink1URL=http://www.we-online.de, ComponentLink2Description=Datasheet, ComponentLink2URL=https://www.we-online.com/catalog/datasheet/150080GS75000.pdf, Dominant Wavelength typ.=525nm, Luminous Intensity typ.=450mcd, Mounting Technology=SMT, Packaging="Tape and Reel", Part Number=150080GS75000, Peak Wavelength typ.=515nm, Published Date="December 2019", Publisher="Wurth Elektronik", Size=0805, Viewing Angle=140deg
IC1 IC2 IC3 IC4: library part IR1161LTRPBF, Manufacturer_Name=Infineon, Supplier Part Number 1=942-IR1161LTRPBF, Height=1.45mm, Manufacturer_Part_Number=IR1161LTRPBF, Supplier 1=Mouser
IC5: library part XL7035E1
IC6: library part AD8215YRZ, "Integrated Circuit Amplifier", Manufacturer_Name="Analog Devices", Supplier Part Number 1=584-AD8215YRZ, Datasheet Link=http://www.analog.com/static/imported-files/data_sheets/AD8215.pdf, Height=1.75mm, Manufacturer_Part_Number=AD8215YRZ, Supplier 1=Mouser
J1 J2: "WR-PHD Socket Header, THT, pitch 2.54mm, Single Row, Vertical, 10p", Contact Resistance=20mOhm, Manufacturer="Wurth Elektronik", Operating Temperature="-40 to +125degC", Rated Current=3A, Withstanding Voltage=500VAC, Working Voltage=250VAC, ComponentLink1Description=Manufacturer, ComponentLink1URL=http://www.we-online.de, ComponentLink2Description=Datasheet, ComponentLink2URL=https://www.we-online.com/catalog/datasheet/61301011821.pdf, Gender="Socket Header", Manufacturer Part Number=61301011821, Mounting Technology=THT, Orientation=Vertical, Packaging=Tray, Pin Number=10, Pitch=2.54mm, Published Date="May 2020", Row Number=Single
L1: library part 7847227010, "WE-RCIS SMT Rod Core Inductor, 1uH, 22.5A", DC Resistance=2mOhm, Inductance=1uH, Manufacturer="Wurth Elektronik", Operating Temperature="-40 to +150degC", Rated Current=22.5A, Saturation Current=29A, Self Resonant Frequency=213MHz, ComponentLink1Description=Manufacturer, ComponentLink1URL=http://www.we-online.de, ComponentLink2Description=Datasheet, ComponentLink2URL=https://www.we-online.com/catalog/datasheet/7847227010.pdf, Diameter=7.1mm, Length=15mm, Manufacturer Part Number=7847227010, Mounting Technology=SMT, Packaging="Tape and Reel", Published Date="Feburary 2021"
L2: library part SRR1280-101M, "Inductor", Manufacturer_Name=Bourns, Mouser Part Number=652-SRR1280-101M, Arrow Part Number=SRR1280-101M, Arrow Price/Stock=https://www.arrow.com/en/products/srr1280-101m/bourns, Datasheet Link=https://componentsearchengine.com/Datasheets/2/SRR1280-101M.pdf, Height=8mm, Manufacturer_Part_Number=SRR1280-101M, Mouser Price/Stock=https://www.mouser.co.uk/ProductDetail/Bourns/SRR1280-101M?qs=brMhP%2FMjUfd8D85Ep5aW7g%3D%3D
M1 M2 M3 M4: "N-Channel 100V 71A 72", Package=None, Availability=Unavailable, MP=BSC010NE2LSI, Price=None
M5 M6 M7 M8: library part M3_Mounting_hole
P1 P3: library part XT60PW-F, "Socket DC Supply Connector Female", Package=Package, Availability=Unavailable, BuyPart=https://www.snapeda.com/parts/XT60PW-F/AMASS/view-part/2890674/?ref=eda, MF=AMASS, MP=XT60PW-F, Price=None, SnapEDA_Link=https://www.snapeda.com/parts/XT60PW-F/AMASS/view-part/2890674/?ref=snap
P2 P4 P5: "WR-PHD Pin Header, THT, pitch 2.54mm, Single Row, Vertical, 2p", Contact Resistance=20mOhm, Manufacturer="Wurth Elektronik", Operating Temperature="-40 to +105degC", Rated Current=3A, Withstanding Voltage=500VAC, Working Voltage=250VAC, ComponentLink1Description=Manufacturer, ComponentLink1URL=http://www.we-online.de, ComponentLink2Description=Datasheet, ComponentLink2URL=https://www.we-online.com/catalog/datasheet/61300211121.pdf, Gender="Pin Header", Manufacturer Part Number=61300211121, Mounting Technology=THT, Orientation=Vertical, Packaging=Bag, Pin Number=2, Pitch=2.54mm, Published Date="May 2020", Row Number=Single
R1: library part FC4L110R005FER, "Resistor 0R005 5W", Manufacturer_Name=Ohmite, Supplier Part Number 1=588-FC4L110R005FER, Height=0.7mm, Manufacturer_Part_Number=FC4L110R005FER, Supplier 1=Mouser
R2 R3 R10 R13 R14: library part CRCW08051K00FKEA, "Resistor 1k Ohm", Supplier Part Number 1=71-CRCW0805-1.0K-E3, Number of Terminations=2, Supplier 1=Mouser
R4 R5 R15 R16: library part CRCW120610R0FKEA, "RES Thick Film, 10Ω, 1%, 0.25W, 100ppm/°C, 1206 / MOSFET Gate Resistor 10Ohm", Case Code (Imperial)=1206, Case Code (Metric)=3216, Max Operating Temperature=155°C, Max Power Dissipation=250mW, Min Operating Temperature=-55°C, Package Quantity=10, Supplier Part Number 1=541-10.0FDKR-ND, Temperature Coefficient=100ppm/°C, Tolerance=1%, Voltage Rating=200V, Case/Package=1206, Composition="Thick Film", Contact Plating=Tin, Depth=1.6mm, Features="Automotive AEC-Q200", Height=0.55mm, Lead Free="Lead Free", Length=3.2mm, Military Standard=Not, Number of Pins=2, Number of Terminations=2, Packaging="Tape and Reel", Power Rating=250mW, Radiation Hardening=No, Resistance=10R, Supplier 1=Digi-Key, Termination=SMD/SMT, Voltage Rating (DC)=200V, Weight=0.000353oz, Width=0.063inch
R6 R7 R8 R9 R18 R19 R20 R21: library part CRCW080510K0FKEA, "Resistor 10K Ohm", Supplier Part Number 1=71-CRCW0805-10K-E3, Number of Terminations=2, Supplier 1=Mouser
R11: library part ERA-6ARB103V, "High Presition and High reliability 10K Ohm Resistor", Supplier Part Number 1=667-ERA-6ARB103V, Supplier 1=Mouser
R12: library part ERA-6ARW153V, "High Presicion 15K Ohm", Supplier Part Number 1=667-ERA-6ARW153V, Supplier 1=Mouser
R17: library part CRCW080510K0FKEB, "High Presicion 10K Ohm", Supplier Part Number 1=26R4046, Supplier 1=Newark
R22: library part CRCW12063R00FKEAHP, "Resistor 3 Ohm", Supplier Part Number 1=71-CRCW0805-10K-E3, Number of Terminations=2, Supplier 1=Mouser
R23 R24: library part CRCW0805470RFKEB, "Resistor 470 Ohm", Supplier Part Number 1=71-CRCW0805470RFKEB, Number of Terminations=2, Supplier 1=Mouser
R25: library part ERA-6AED153V, "15K Ohm Resistor", Supplier Part Number 1=667-ERA-6AED153V, Supplier 1=Mouser
R26: library part CRCW08052K00FKEB, "RES Thick Film, 2kΩ, 1%, 0.125W, 100ppm/°C, 0805", Case Code (Imperial)=0805, Case Code (Metric)=2012, Max Operating Temperature=155°C, Max Power Dissipation=125mW, Min Operating Temperature=-55°C, Package Quantity=10000, Resistance=2kR, Supplier Part Number 1=71-CRCW08052K00FKEB, Temperature Coefficient=100ppm/°C, Tolerance=1%, Voltage Rating=150V, Case/Package=0805, Composition="Thick Film", Contact Plating=Tin, Features="Automotive AEC-Q200", Height=0.02inch, Lead Free="Lead Free", Length=0.079inch, Number of Pins=2, Number of Terminations=2, Packaging="Tape and Reel", Power Rating=125mW, Radiation Hardening=No, Supplier 1=Mouser, Termination=SMD/SMT, Voltage Rating (DC)=150V, Weight=0.000194oz, Width=0.049inch
R27: library part CRCW08055K00FKTA, "Resistor 5K Ohm", Supplier Part Number 1=71-CRCW08051K30FKEB, Number of Terminations=2, Supplier 1=Mouser
R28 R30: library part PWR163S-25-2000FE, "Resistor 200 Ohm / 25W", Manufacturer_Name=Bourns, Manufacturer_Part_Number=PWR163S-25-3000FE, Supplier Part Number 1=652-PWR163S253000FE, Datasheet Link=https://componentsearchengine.com/Datasheets/1/PWR163S-25-3000FE.pdf, Height=2.79mm, Supplier 1=Mouser
R29: library part CRCW08051M00FKEA, "RES Thick Film, 1MΩ, 1%, 0.125W, 100ppm/°C, 0805 / 1M Ohm Resistor", Case Code (Imperial)=0805, Case Code (Metric)=2012, Max Operating Temperature=155°C, Min Operating Temperature=-55°C, Package Quantity=5000, Power Rating=125mW, Resistance=1MR, Supplier Part Number 1=71-CRCW08051M00FKEAH, Temperature Coefficient=100ppm/°C, Tolerance=1%, Voltage Rating=150V, Case/Package=0805, Composition="Thick Film", Contact Plating=Tin, Depth=1.25mm, Height=0.45mm, Lead Free="Lead Free", Length=2mm, Military Standard=Not, Mount="Surface Mount", Number of Pins=2, Packaging="Tape and Reel", Radiation Hardening=No, Supplier 1=Mouser, Termination=SMD/SMT, Voltage Rating (DC)=150V, Weight=0.000194oz, Width=1.25mm
R31: library part ERJ-6ENF5622V, "56K Ohm Resistor", Supplier Part Number 1=667-ERJ-6ENF5622V, Supplier 1=Mouser
RT1: library part NTCS0805E3103HMT, "Thermistor 10Kohm B Parameter: 3950k", Manufacturer_Name=Vishay, Supplier Part Number 1=594-NTCS0805E3103HMT, Datasheet Link=http://www.vishay.com/docs/29044/ntcs0805e3t.pdf, Height=0.95mm, Manufacturer_Part_Number=NTCS0805E3103HMT, Supplier 1=Mouser
TP1 TP2 TP3 TP4 TP5 TP6 TP7 TP8 TP9 TP10: library part "Test Point", "Test Point 1mm by 1mm"
U1: library part TS432AILT, "Shunt voltage reference, adjustable, 1.24 to 10V, 0.5% precision, 3-Pin SOT23-3L, Tape and Reel", Supplier Part Number 1=497-TS432AILTCT-ND, ComponentLink1Description="Manufacturer URL", ComponentLink1URL=http://www.st.com, ComponentLink2Description=Datasheet, ComponentLink2URL=http://www.st.com/internet/com/TECHNICAL_RESOURCES/TECHNICAL_LITERATURE/DATASHEET/CD00003202.pdf, DatasheetVersion=Apr-2008, PackageDescription="3-Pin SOT-23 Package 0.95 mm Pitch, 2.4 mm Lead Span", PackageReference=SOT23-3, PackageVersion=2011, Supplier 1=Digi-Key

## Via types
v1: diameter 0.6, hole 0.3, Top Layer to Bottom Layer, 271 vias
v2: diameter 1, hole 0.5, Top Layer to Bottom Layer, 2 vias

## Nets (pads, with @x,y where several pads share a name; then routed paths per layer and width w, separated by ;. In a path a pad name is that pad's centre, name@x,y a point inside that pad or via, vN(x,y) a via of type N, cw(c..) or ccw(c..) an arc to the next point about the centre after c; other vN are vias at no path point)
5V: C7.2 C27.2 C28.2 C36.1 C37.2 C38.2 C39.1 D1.2 D2.2 IC3.1 IC4.1 IC6.6 J1.8 L2.2 R10.2 R25.2 R26.2 | length 193
  Top Layer w0.254: C27.2@12.7,7.825 13.225,8.35 IC3.1 ; C28.2@27.947,54.479 28.254,54.479 C28.2 ; L2.2 39.778,33.966 38.03,35.714 38.03,39.542 35.8,41.772 35.8,45.6 37.45,47.25 C37.2 43.975,47.425 R25.2 ; R26.2 C38.2 ; 42.937,30.661 42.976,30.7 ; IC6.6 59.986,21.058 59.175,20.247 C39.1 59.175,19.647 60.381,18.441 60.381,18.009 J1.8 ; C7.2 C7.2@61.65,14.175
  Top Layer w0.5: C27.2 12.7,7.825 12.928,7.597 12.928,6.284 15.566,3.646 27.307,3.646 27.6,3.939 27.6,4.1 27.75,4.25 27.75,4.55 D1.2 43.4,4.7 47.4,8.7 47.4,18.8 44,22.2 44,27.753 C36.1@43.816,27.936 ; D2.2 21.5,56.1 v1(21.5,57.4) ; IC4.1 26.85,54.55 26.9,54.6 27.171,54.6 27.207,54.636 27.947,54.636 C28.2@28.448,55.022 ; C28.2 34.007,54.825 34.3,54.532 34.3,36.1 36.434,33.966 L2.2@39.778,33.966 ; R10.2 42.675,26.795 C36.1@43.816,27.936 ; C36.1@43.516,28.236 C36.1@43.816,27.936 ; C36.1 44.766,23.934 55.982,12.718 60.193,12.718 60.947,13.472 61.247,13.472 61.475,13.7 C7.2 ; C7.2@61.65,14.175 J1.8
  Top Layer w1: L2.2 41.228,33.966 42.976,32.218 42.976,30.7 42.976,29.727 43.516,29.186 C36.1@43.516,28.236 ; C38.2 42.937,30.661
  Bottom Layer w0.5: v1(21.5,57.4) 31.5,57.4 v1(34.1,54.8)
Curr+: R1.4 R24.2 | length 8.7
  Top Layer w0.254: R24.2 72.625,20.3 73.527,21.202 73.727,21.202 74.2,21.675 R1.4
Curr-: R1.3 R23.2 | length 5.1
  Top Layer w0.254: R23.2 66.575,25.35 69.327,22.598 69.327,22.348 R1.3
Current_ADC_Output: IC6.5 J2.4 | length 33
  Top Layer w0.254: v1(54.2,18.6) 54.2,21.3 55.188,22.288 IC6.5
  Bottom Layer w0.254: v1(54.2,18.6) 54.2,17.496 62.692,9.005 64.305,9.005 J2.4
GND: C1.2 C2.2 C3.2 C4.2 C5.1 C6.1 C7.1 C8.1 C9.1 C10.1 C11.1 C23.1 C24.1 C27.1 C28.1 C29.1 C30.1 C32.2 C33.1 C34.2 C35.1 C36.2 C38.1 C39.2 C40.1 D3.2 D4.1 IC3.2 IC4.2 IC5.3 IC5.5 IC5.6 IC6.2 J1.9 J2.1 M3.1 M3.2 M3.3 M4.1 M4.2 M4.3 R1.2 R17.1 R18.1 R19.1 R20.1 R21.1 R27.1 R28.1 R30.2 R31.1 RT1.2 TP9.1 TP10.1 U1.3 | length 75.5
  Top Layer w0.254: v1(11.8,11.6) 11.857,11.6 12.4,11.057 C27.1 12.751,9.824 14.015,9.824 14.827,9.012 14.827,8.523 IC3.2 15,7.325 14.525,6.85 R20.1 ; C29.1 17.5,7.1 v1(18,6.6) ; R18.1 20.505,11.495 v1(21,11) ; C30.1 v1(23,56) 23.4,56.4 23.4,56.514 23.992,57.106 25.719,57.106 26.575,56.25 R21.1 ; IC4.2 25.9,55.231 26.071,55.402 26.227,55.402 26.575,55.75 R21.1 ; R19.1 v1(30.025,53.475) v1@30.1,53.4 ; v1(29.5,58.577) 29.5,58.483 29.251,58.234 29.251,57.526 28.9,57.175 28.3,57.175 27.949,56.824 27.949,56.524 27.425,56 R21.1 ; RT1.2 v1(33.2,20) ; v1(36,31.2) 36.094,31.2 36.321,30.973 37.057,30.973 D4.1 39.247,30.55 C38.1 ; C23.1 39.7,10.825 40.253,10.272 40.253,9.847 v1(41,9.1) 41.066,9.166 41.066,9.312 42.05,10.296 U1.3 ; C24.1 41.3,21.082 v1(41.3,23) ; R17.1 43.3,16.475 44.425,17.6 v1(44.7,17.6) ; C39.2 57.176,19.596 57.176,18.674 J1.9 59.11,14.015 C7.1 ; C32.2 61.2,20.041 v1(61.2,18.8) ; v1(61.2,25.8) 61.256,25.856 IC6.2 ; C33.1 66.21,27.869 67.141,28.8 v1(67.2,28.8) ; v1(82.4,18.7) 82.4,20.276 R31.1 82.449,20.325 C40.1
  Top Layer w1: v1(41.6,57.1) 43.9,57.1 D3.2 ; v1(48.3,51) 48.366,50.934 48.366,50.812 IC5.5@49.632,49.546 ; R27.1 49.632,51.793 IC5.5@49.632,49.546 ; IC5.5 IC5.5@49.632,49.546 ; C36.2 50.403,27.9 v2(53.6,27.9) ; v1(52.129,45.8) 52.3,45.8 52.957,46.457 52.957,48.246 IC5.3 ; R30.2 61.636,42 v1(63.1,42) ; C35.1 61.7,47.15 v1(61.7,45.5) ; R28.1 65.886,47.4 v1(67.4,47.4)
  other v1: 7.9,1.2 11.7,1.2 18,1.2 24.1,1.3 30.3,1.4 8,5.9 2.5,10.3 7.9,10.4 2.4,14.7 2.3,18.6 5.2,21 71.3,24.8 72.5,24.8 5.2,26.1 71.3,26.1 72.5,26.1 71.3,27.4 72.5,27.4 71.3,28.6 72.5,28.6 71.3,29.8 72.5,29.8 71.3,31.1 72.5,31.1 71.3,32.5 72.5,32.5 5.1,32.8 48.4,34.1 50.7,34.1 53,34.1 55.3,34.1 57.6,34.1 48.4,35.9 50.7,35.9 53,35.9 55.3,35.9 57.6,35.9 48.4,37.6 50.7,37.6 53.032,37.6 55.3,37.6 57.6,37.6 31.5,38.4 48.4,39.4 50.7,39.4 53,39.5 55.3,39.5 57.6,39.5 31.5,39.6 2.1,39.7 31.5,40.8 48.4,41.2 50.7,41.2 53,41.2 55.3,41.2 57.6,41.2 31.5,42 31.5,43.3 31.5,44.5 2,45.5 31.5,45.6 31.5,46.7 31.5,47.9 31.5,49 8,50.8 2,50.9 2.1,57 7.9,57.3 2.2,63.1 8,63.1 2.4,69.1 8,69.4
NetC12_1: C12.1 C14.1 C16.1 C19.1 C21.1 C25.1 IC1.2 M2.1 M2.2 M2.3 M4.5_8 P3.2 R6.1 R8.1 R13.2 TP3.1 | length 28.8
  Top Layer w0.254: M4.5_8@18.413,16.995 21.532,16.995 21.681,16.846 21.681,8.381 20.963,7.662 ; R13.2 19.548,7.877 20.748,7.877 20.963,7.662 ; R8.1 25.873,6.948 25.873,8.223 IC1.2 ; C14.1 27.78,8.55 27.631,8.699 27.631,9.108 27.408,9.331 26.492,9.331 26.173,9.012 26.173,8.523 IC1.2 ; 20.963,7.662 21.825,6.8 C12.1 22.176,6.851 22.176,7.551 23.15,8.525 R6.1 23.65,8.525 24.456,9.331 25.508,9.331 25.827,9.012 25.827,8.523 IC1.2
  other v1: 15.238,17.075 16.484,17.075 17.729,17.075 18.975,17.075 15.238,18.9 16.484,18.9 17.729,18.9 18.975,18.9 20.8,19.1 15.238,20.805 16.484,20.805 17.729,20.805 18.975,20.805
NetC12_2: C12.2 D1.1 IC1.1 | length 5
  Top Layer w0.254: IC1.1 25.05,8.05 24.526,7.526 24.526,6.851 C12.2 24.526,6.149 24.526,5.724 25.55,4.7 D1.1
NetC13_1: C13.1 C15.1 C16.2 C17.2 C18.2 C19.2 C20.2 C21.2 C25.2 C26.2 IC2.2 M1.1 M1.2 M1.3 M3.5_8 R7.1 R9.1 R14.2 TP4.1 | length 32.3
  Top Layer w0.254: C15.1 13.246,55.95 13.93,56.635 13.93,56.744 14.292,57.106 16.019,57.106 R9.1@16.875,56.25 ; IC2.2 16.173,54.423 16.173,55.048 16.875,55.75 R9.1 R9.1@16.875,56.25 ; C13.1 C13.1@19.2,54.475 ; R7.1 19.75,48.825 20.098,48.477 20.098,47.702 v1(20.7,47.1) ; 21.4,47.1 21.4,51.42 19.551,53.269 19.551,54.124 C13.1@19.2,54.475 ; v1(22.1,47.1) 23,48 R14.2 ; R9.1@16.875,56.25 17.223,56.598 17.473,56.598 19.056,58.181 21.719,58.181 22.319,57.581 22.319,55.43 21.364,54.475 C13.1@19.2,54.475
  other v1: 14.3,29 15.8,29 17.4,29 18.9,29 20.5,29 22,29 23.5,29 25.1,29 14.3,30.5 15.8,30.5 17.4,30.5 18.9,30.5 20.5,30.5 22,30.5 23.5,30.5 25.1,30.5 20.7,38.8 22.1,38.8 20.7,40 22.1,40 24.025,40.095 25.271,40.095 26.516,40.095 27.762,40.095 20.7,41.3 22.1,41.3 24.025,42 25.271,42 26.516,42 27.762,42 20.7,42.5 22.1,42.5 20.7,43.8 22.1,43.8 24.025,43.825 25.271,43.825 26.516,43.825 27.762,43.825 20.7,44.9 22.1,44.9 20.7,46 22.1,46
NetC13_2: C13.2 D2.1 IC2.1 | length 6.6
  Top Layer w0.254: C13.2 18.6,52.125 18.249,52.476 18.249,52.651 16.95,53.95 IC2.1 16.95,54.55 17.294,54.894 17.508,54.894 18.191,55.577 19.077,55.577 D2.1
NetC14_2: C14.2 IC1.4 R2.1 | length 3.6
  Top Layer w0.254: IC1.4 28.2,10.85 28.6,10.45 C14.2 R2.1
NetC15_2: C15.2 IC2.4 R3.1 | length 3.8
  Top Layer w0.254: C15.2 13.046,52.7 R3.1 13.271,52.675 14.196,51.75 IC2.4
NetC17_1: C17.1 C18.1 C20.1 C26.1 P3.1
NetC22_1: C22.1 TP6.1 U1.1 | length 3.4
  Top Layer w0.254: U1.1 44.956,12.646 45,12.602 v1(45,11.2)
NetC22_2: C22.2 R12.1 R17.2 | length 3.9
  Top Layer w0.254: R12.1 R17.2 44.785,14.525 C22.2
NetC29_2: C29.2 IC3.4 R13.1 | length 3.5
  Top Layer w0.254: IC3.4 16.9,10.85 17.3,10.45 C29.2 17.775,10.175 R13.1
NetC30_2: C30.2 IC4.4 R14.1 | length 3.4
  Top Layer w0.254: R14.1 C30.2 24.777,52.05 24.95,51.877 IC4.4
NetC31_1: C31.1 C33.2 IC6.1 R23.1 | length 6.5
  Top Layer w0.254: IC6.1 64.532,27.712 C33.2 64.625,27.619 R23.1 64.625,25.35 64.973,25.002 65.213,25.002 65.6,24.615 C31.1
NetC31_2: C31.2 C32.1 IC6.8 R24.1 | length 6.4
  Top Layer w0.254: IC6.8 62.526,20.336 C32.1 62.92,20.3 R24.1 64.673,20.648 64.673,21.207 65.032,21.566 65.032,21.781 65.385,22.134 C31.2
NetC34_1: C34.1 C35.2 IC5.1 R22.1 | length 11.8
  Top Layer w1: IC5.1 56.432,49.098 56.88,49.546 R22.1 ; C34.1 59.711,52.289 R22.1 ; C35.2 59.75,49.507 R22.1
NetC37_1: C37.1 IC5.4 R25.1 R27.2 | length 14.5
  Top Layer w0.254: C37.1 44.025,49.375 R25.1 46.1,49.375 47.774,47.701 47.774,47.265 48.899,46.14 50.376,46.14 51.332,47.096 IC5.4 51.475,48.464 R27.2
NetD3_1: D3.1 IC5.2 L2.1 | length 28
  Top Layer w1: L2.1@40.553,44.066 41.007,43.612 52.354,43.612 54.657,45.915 54.657,48.303 IC5.2@54.675,48.321 ; D3.1@50.871,57.121 51.446,56.546 51.446,54.196 54.732,50.909 IC5.2@54.732,48.371
NetD4_2: D4.2 R26.1 | length 1.9
  Top Layer w0.254: D4.2 37.612,28.582 R26.1
NetIC1_3: IC1.3 R8.2 | length 2
  Top Layer w0.254: IC1.3 26.95,7.369 27.121,7.198 27.127,7.198 27.475,6.85 R8.2
NetIC1_5: IC1.5 R4.1 | length 2.6
  Top Layer w0.254: IC1.5 25.05,11.15 25.898,11.998 25.975,11.998 26.526,12.549 R4.1
NetIC2_3: IC2.3 R9.2 | length 1.8
  Top Layer w0.254: R9.2 15.05,55.875 IC2.3
NetIC2_5: IC2.5 R5.1 | length 3.3
  Top Layer w0.254: R5.1 14.774,49.951 16.1,51.277 16.777,51.277 16.95,51.45 IC2.5
NetIC3_3: IC3.3 R20.2 | length 2
  Top Layer w0.254: IC3.3 15.95,7.369 16.121,7.198 16.127,7.198 16.475,6.85 R20.2
NetIC3_5: IC3.5 R15.1 | length 2
  Top Layer w0.254: R15.1 14.05,12.624 IC3.5
NetIC4_3: IC4.3 R21.2 | length 1.9
  Top Layer w0.254: R21.2 24.625,54.875 24.95,54.55 IC4.3
NetIC4_5: IC4.5 R16.1 | length 3.3
  Top Layer w0.254: R16.1 24.674,50.051 25.225,50.602 26.002,50.602 26.85,51.45 IC4.5
NetJ1_1: J1.1 P2.2 | length 3.5
  Top Layer w0.254: J1.1 79.57,16.88 P2.2
NetM1_4: M1.4 R5.2 R7.2 TP2.1 | length 8.2
  Top Layer w0.254: M1.4 18.363,49.163 R5.2 17.826,49.876 18.377,50.427 19.152,50.427 R7.2
  other v1: 18.4,45.3
NetM2_4: M2.4 R4.2 R6.2 TP1.1 | length 6.7
  Top Layer w0.254: M2.4 23,13.274 R4.2 23.474,10.549 R6.2
  other v1: 23,15.7
NetM3_4: M3.4 R16.2 R19.2 TP8.1 | length 8.9
  Top Layer w0.254: R19.2 28.152,51.177 28.152,50.226 R16.2 27.726,49.549 29.9,47.375 29.9,44 29.863,43.963 M3.4
  other v1: 29.9,45.5
NetM4_4: M4.4 R15.2 R18.2 TP7.1 | length 9.8
  Top Layer w0.254: v1(13.1,15.6) 13.8,15.6 14.089,15.889 ; M4.4 13.35,16.995 13.523,16.822 13.523,16.455 14.089,15.889 ; R18.2 19.25,13.445 18.605,12.8 R15.2 16.926,13.051 14.089,15.889
NetP1_1: P1.1 P1.S1 P1.S2 R1.1 | length 13.5
  Bottom Layer w2: P1.S1 P1.S2
NetP4_1: P4.1 R28.2 | length 4.3
  Top Layer w1: P4.1 70.73,47.164 R28.2
NetP5_1: P5.1 R30.1 | length 4.9
  Top Layer w1: R30.1 67.084,41.572 67.728,41.572 69.1,40.2 70.53,40.2 P5.1
Temp_ADC: C24.2 P2.1 R11.1 RT1.1 | length 51.1
  Top Layer w0.254: RT1.1 37.975,17.8 38.8,16.975 R11.1 38.9,21.032 C24.2
  Bottom Layer w0.254: v1(38.9,19.1) 40,20.2 P2.1
Vout: C5.2 C6.2 L1.2 P1.2 P4.2 P5.2 R22.2 R29.2 | length 51.1
  Top Layer w0.254: v1(85.9,22.9) 86.399,22.401 R29.2
  Top Layer w1: R22.2 62.611,49.196 63.534,48.273 63.534,47.766 v2(63.6,47.7)
  Bottom Layer w0.254: P5.2 68.905,35.635 68.905,24.395 69.6,23.7 73.3,23.7 74.1,22.9 v1(85.9,22.9)
  Bottom Layer w1: v2(63.6,47.7) 64.527,47.7 66.427,45.8 71.397,45.8 73.155,44.041 73.155,43.115 P4.2
Vout_ADC: C40.2 J2.3 R29.1 R31.2 | length 27.4
  Top Layer w0.254: J2.3 86.399,13.549 R29.1 86.149,19.525 85.801,19.873 85.801,19.929 85.43,20.3 R31.2 84.349,20.325 C40.2
Vout_Pre_Filter: C1.1 C2.1 C3.1 C4.1 C8.2 C9.2 C10.2 C11.2 L1.1 M1.5_8 M2.5_8 R2.2 R3.2 | length 8.9
  Top Layer w0.254: v1(12.3,45.6) 13.021,46.321 R3.2
  Top Layer w0.5: M2.5_8@28.276,16.995 28.7,16.995 28.8,16.895 R2.2
  other v1: 5.9,16.4 7.6,16.4 9.3,16.4 25.101,17.075 26.347,17.075 27.592,17.075 28.838,17.075 5.9,18.1 25.101,18.9 26.347,18.9 27.592,18.9 28.838,18.9 25.101,20.805 26.347,20.805 27.592,20.805 28.838,20.805 12.525,40.095 13.771,40.095 15.016,40.095 16.262,40.095 10.6,40.5 12.525,42 13.771,42 15.016,42 16.262,42 10.6,42.2 5.7,43.8 7.3,43.8 8.9,43.8 10.6,43.8 12.525,43.825 13.771,43.825 15.016,43.825 16.262,43.825 10.6,45.6 14,45.6 15.7,45.6 59.5,62 63,62 40,62.5 28.2,62.6 46.1,62.6 21.1,62.7 21.1,67.3 28.1,67.4 39.9,67.4 46.1,67.4 59.3,67.5 62.9,67.5
Vref_3.1V: C23.2 R10.1 R11.2 R12.2 TP5.1 U1.2 | length 11.5
  Top Layer w0.254: v1(37.2,13.6) 37.266,13.666 37.441,13.666 38.8,15.025 R11.2 ; R10.1 40.725,16.95 R12.2 41.1,16.475 40.198,15.573 39.448,15.573 R11.2 ; U1.2 40.229,12.646 39.7,13.175 C23.2 39.251,13.175 38.9,13.526 R11.2
pads on no net: IC6.3 IC6.4 IC6.7 J1.2 J1.3 J1.4 J1.5 J1.6 J1.7 J1.10 J2.2 J2.5 J2.6 J2.7 J2.8 J2.9 J2.10 M5.1 M6.1 M7.1 M8.1 P3.S1 P3.S2 R28.3 R30.3
copper on no net:
  other v1: 60.646,30.5 62.146,30.5 64.146,30.5 66.146,30.5 67.646,30.5 60.646,32 62.146,32 64.146,32 66.146,32 67.646,32 60.646,33.5 62.146,33.5 64.146,33.5 66.146,33.5 67.646,33.5 60.646,35 62.146,35 64.146,35 66.146,35 67.646,35 60.646,36.5 62.146,36.5 64.146,36.5 66.146,36.5 67.646,36.5 60.646,37.8 62.146,37.8 64.146,37.8 66.146,37.8 67.646,37.8 64.806,51.449 66.306,51.449 68.306,51.449 70.306,51.449 71.806,51.449 64.806,52.749 66.306,52.749 68.306,52.749 70.306,52.749 71.806,52.749 64.806,54.249 66.306,54.249 68.306,54.249 70.306,54.249 71.806,54.249 64.806,55.749 66.306,55.749 68.306,55.749 70.306,55.749 71.806,55.749 64.806,57.249 66.306,57.249 68.306,57.249 70.306,57.249 71.806,57.249 64.806,58.749 66.306,58.749 68.306,58.749 70.306,58.749 71.806,58.749

## Polygon pours and split planes (outlines as drawn)
GND on Bottom Layer "GND_L04_P019" (solid, remove dead copper, pour order 19): 32.703,0 88,0 88,52.9 72.9,52.9 72.9,61 32.603,61
NetP1_1 on Bottom Layer "NETP1_1_L04_P007" (solid, remove dead copper, pour order 7): 73.9,23 88,23 88,42.8 73.9,42.8
Vout_Pre_Filter on Bottom Layer "VOUT_PRE_FILTER_L04_P018" (solid, remove dead copper, pour order 18): 32.5,3.4 12,3.4 12,69.9 88,69.9 88,52.9 72.9,52.9 72.9,61 32.4,61
GND on Bottom Layer "GND_L04_P017" (solid, remove dead copper, pour order 17): 88,80 88,69.9 12,69.9 12,3.4 32.5,3.4 32.5,0 0,0 0,80
NetC13_1 on Bottom Layer "NETC13_1_L04_P016" (solid, remove dead copper, pour order 16): 13.5,25.8 26.4,25.8 26.4,47.6 17.2,47.6 17.2,43.3 17.1,43.2 17.1,37.8 13.6,37.8 13.5,37.8
GND on Top Layer "GND_L01_P013" (solid, remove dead copper, pour order 13): 77.1,69.9 88,69.9 88,80 0,80 0,0 32.5,0 32.5,3.4 11.2,3.4 11.2,15.9 12.4,17.1 14.2,17.1 14.2,21.2 11.6,21.2 10,22.8 7.5,22.8 7.5,37.5 10.1,37.5 10.1,40.8 10,40.9 5.1,40.9 5.1,46.5 12,46.5 12,70
NetC12_1 on Top Layer "NETC12_1_L01_P010" (solid, remove dead copper, pour order 10): 7.5,31 7.5,22.8 10,22.8 11.6,21.2 14.2,21.2 14.2,16.2 14.4,16.4 24.3,16.4 24.3,21.7 32.5,21.7 32.5,25.8 13.5,25.8 13.5,31
GND on Top Layer "GND_L01_P008" (solid, remove dead copper, pour order 8): 29,43.4 29.9,43.4 29.9,49.7 32.5,49.7 32.5,37.5 29,37.5
Vout_Pre_Filter on Top Layer "VOUT_PRE_FILTER_L01_P015" (solid, remove dead copper, pour order 15): 72.9,52.7 72.9,61 12,61 12,70 87.9,70 88,69.9 88,52.7
Vout_Pre_Filter on Top Layer "VOUT_PRE_FILTER_L01_P012" (solid, remove dead copper, pour order 12): 24.3,16.4 32.5,16.4 32.5,21.7 24.3,21.7
GND on Top Layer "GND_L01_P003" (solid, remove dead copper, pour order 3): 76.4,36.3 76.4,33 73.6,33 73.6,23.7 73.5,23.8 68.3,23.8 68.3,36.3
Vout on Top Layer "VOUT_L01_P000" (solid, remove dead copper, pour order 0): 69,36.3 88,36.3 88,52.7 72.9,52.7 72.9,45 72,45 72,39 69,39
Vout_Pre_Filter on Top Layer "VOUT_PRE_FILTER_L01_P011" (solid, remove dead copper, pour order 11): 4.9,19 10,19 10,13.5 4.9,13.5
Vout_Pre_Filter on Top Layer "VOUT_PRE_FILTER_L01_P009" (solid, remove dead copper, pour order 9): 17.1,46.5 17.1,37.5 10.1,37.5 10.1,40.9 10,40.9 5.1,40.9 5.1,46.5
NetC13_1 on Top Layer "NETC13_1_L01_P006" (solid, remove dead copper, pour order 6): 17.1,43.2 20,43.2 20,47.5 20.1,47.6 29,47.6 29,37.5 17.1,37.5 17.1,39.5
NetC13_1 on Top Layer "NETC13_1_L01_P005" (solid, remove dead copper, pour order 5): 14.1,34.1 32.5,34.1 32.5,25.8 13.5,25.8 13.5,33.5
NetC17_1 on Top Layer "NETC17_1_L01_P004" (solid, remove dead copper, pour order 4): 7.5,37.5 32.5,37.5 32.5,34.1 14.466,34.1 13.759,33.393 13.759,31 7.5,31
NetP1_1 on Top Layer "NETP1_1_L01_P002" (solid, remove dead copper, pour order 2): 73.6,33 76.4,33 76.4,36.3 88,36.3 88,23.6 87.9,23.7 73.6,23.7
NetC13_1 on Mid 2 (split plane): 26.373,48.047 26.373,27.653 26.347,27.627 13.627,27.627 13.627,37.673 16.7,37.673 16.749,37.682 16.79,37.71 16.818,37.751 16.827,37.8 16.827,47.947 16.953,48.073 26.347,48.073
GND on Mid 2 (split plane): 72.873,44.827 69.1,44.827 69.051,44.818 69.01,44.79 68.982,44.749 68.973,44.7 68.973,23.8 68.982,23.751 69.01,23.71 69.051,23.682 69.1,23.673 87.49,23.673 87.49,0.51 32.627,0.51 32.627,60.973 72.873,60.973
Vout_Pre_Filter on Mid 2 (split plane): 76.873,61.227 32.5,61.227 32.451,61.218 32.41,61.19 32.382,61.149 32.373,61.1 32.373,15.527 5.127,15.527 5.127,69.873 76.873,69.873
GND on Mid 2 (split plane): 87.49,23.927 69.227,23.927 69.227,44.573 73,44.573 73.049,44.582 73.09,44.61 73.118,44.651 73.127,44.7 73.127,60.973 77,60.973 77.049,60.982 77.09,61.01 77.118,61.051 77.127,61.1 77.127,70 77.118,70.049 77.09,70.09 77.049,70.118 77,70.127 5,70.127 4.951,70.118 4.91,70.09 4.882,70.049 4.873,70 4.873,15.4 4.882,15.351 4.91,15.31 4.951,15.282 5,15.273 32.373,15.273 32.373,0.51 0.51,0.51 0.51,79.49 87.49,79.49
GND on Mid 1 (split plane): 87.49,23.927 69.227,23.927 69.227,26.7 69.218,26.749 69.19,26.79 69.149,26.818 69.1,26.827 69.051,26.818 69.01,26.79 68.982,26.749 68.973,26.7 68.973,23.6 68.982,23.551 69.01,23.51 69.051,23.482 69.1,23.473 69.149,23.482 69.19,23.51 69.218,23.551 69.227,23.6 69.227,23.673 87.49,23.673 87.49,0.51 32.627,0.51 32.627,22.5 32.627,60.973 72.873,60.973 72.873,44.827 69.1,44.827 69.051,44.818 69.01,44.79 68.982,44.749 68.973,44.7 68.973,36.5 68.982,36.451 69.01,36.41 69.051,36.382 69.1,36.373 69.149,36.382 69.19,36.41 69.218,36.451 69.227,36.5 69.227,44.573 73,44.573 73.049,44.582 73.09,44.61 73.118,44.651 73.127,44.7 73.127,61.1 73.118,61.149 73.09,61.19 73.049,61.218 73,61.227 32.5,61.227 32.451,61.218 32.41,61.19 32.382,61.149 32.373,61.1 32.373,22.5 32.373,0.51 0.51,0.51 0.51,79.49 87.49,79.49

## Other copper
Mid 1 (plane layer: these items are gaps in the copper):
  lines w0.25: 32.5,0 32.5,22.5 32.5,61.1 73,61.1 73,44.7 69.1,44.7 69.1,36.5 ; 69.1,23.6 69.1,26.7 ; 69.1,23.8 88,23.8